# EAGLE board ESP32_Thing_Plus-Panel (EAGLE 9.6.2), part 1 of 4
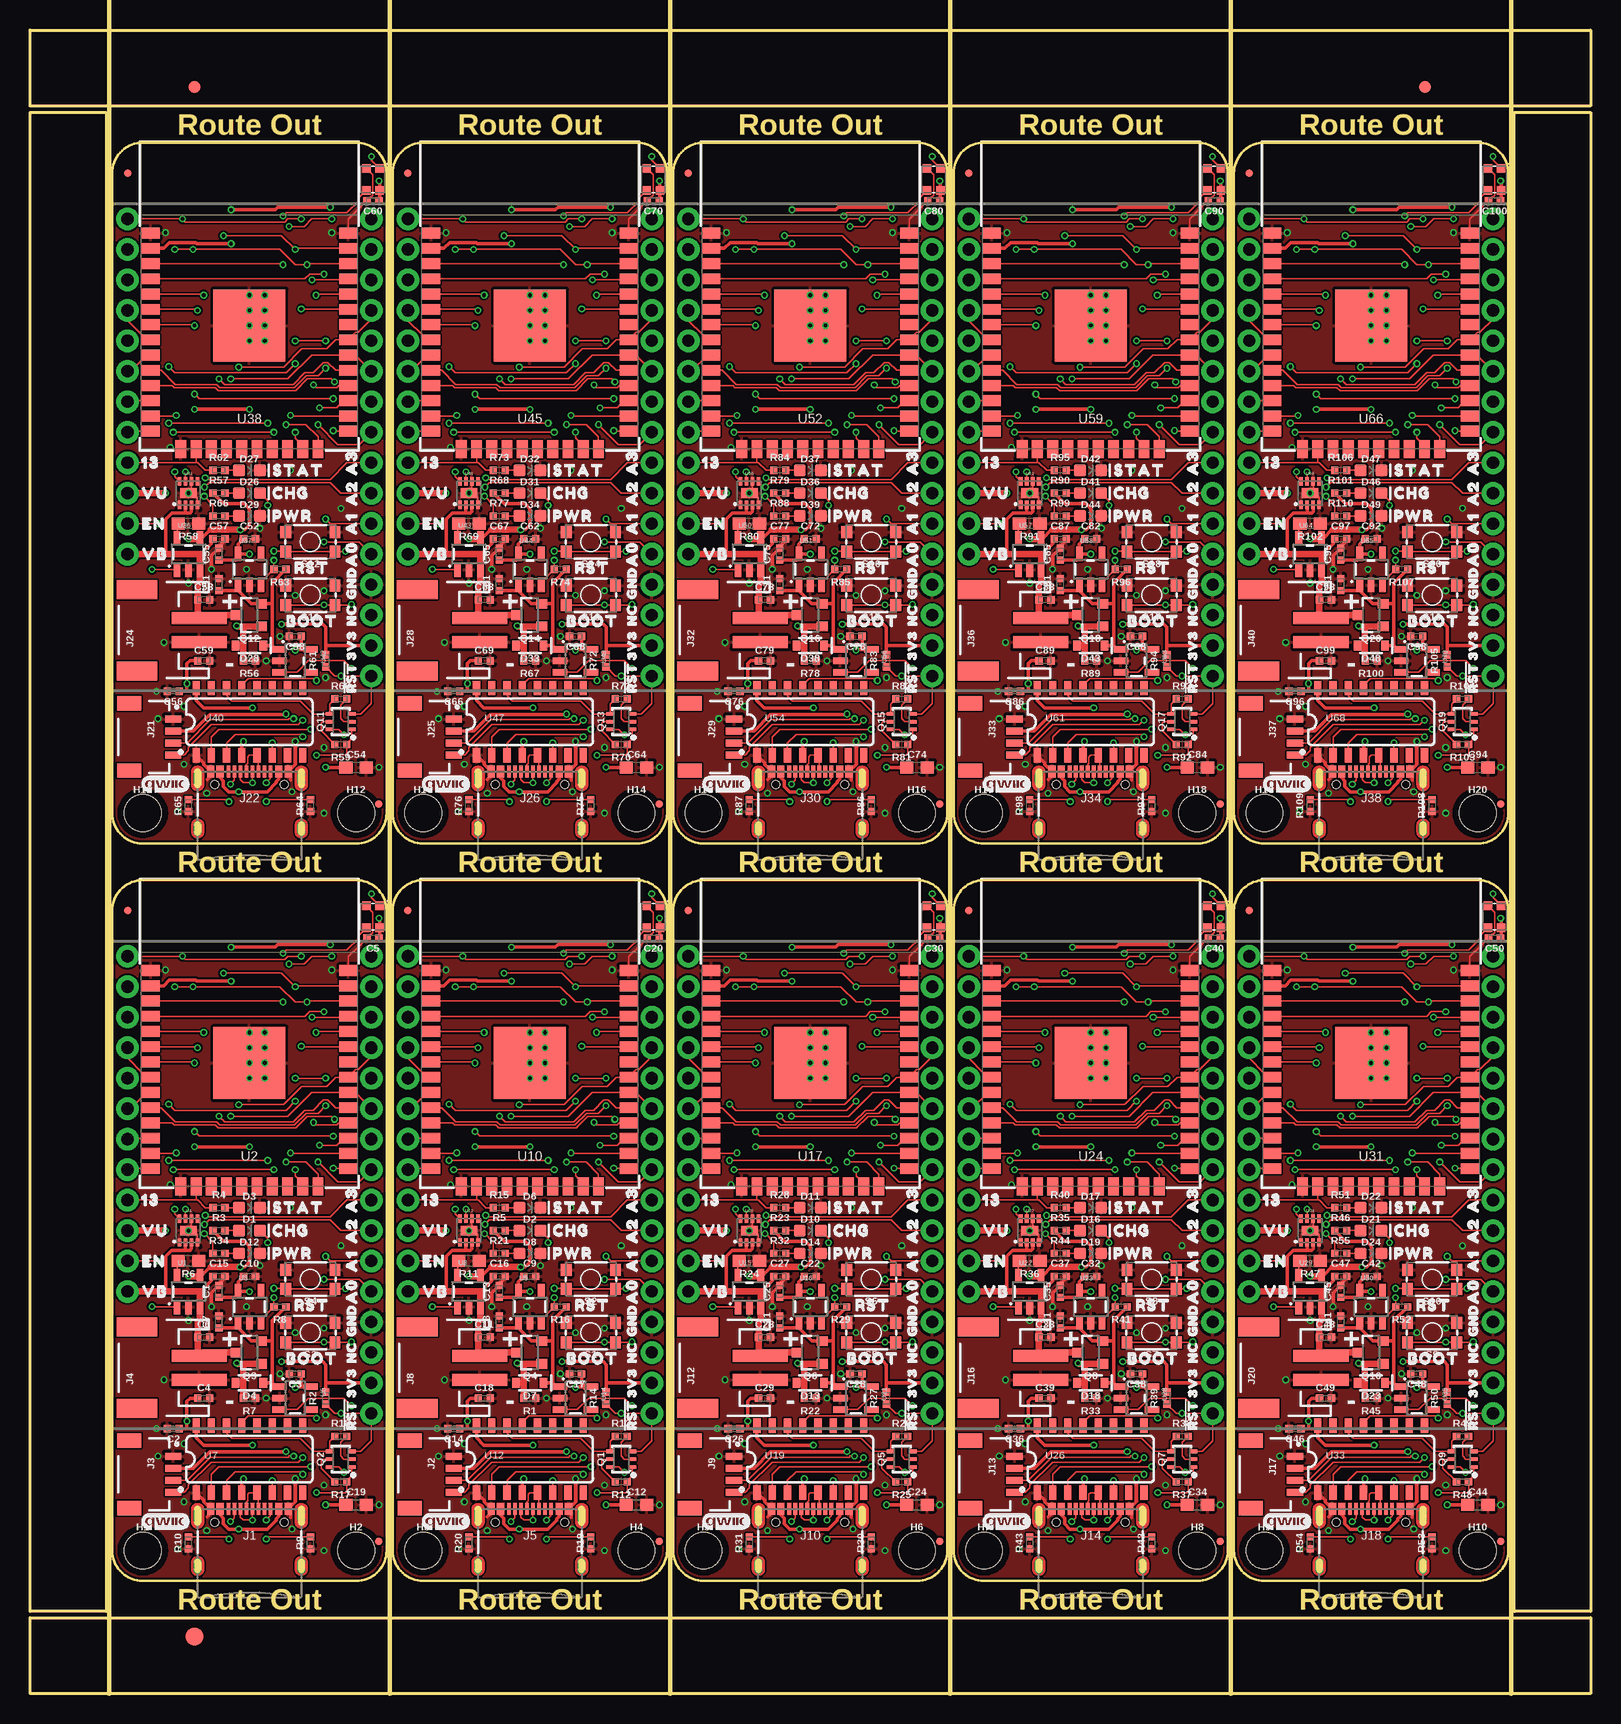
[diagram p0: board, top side]
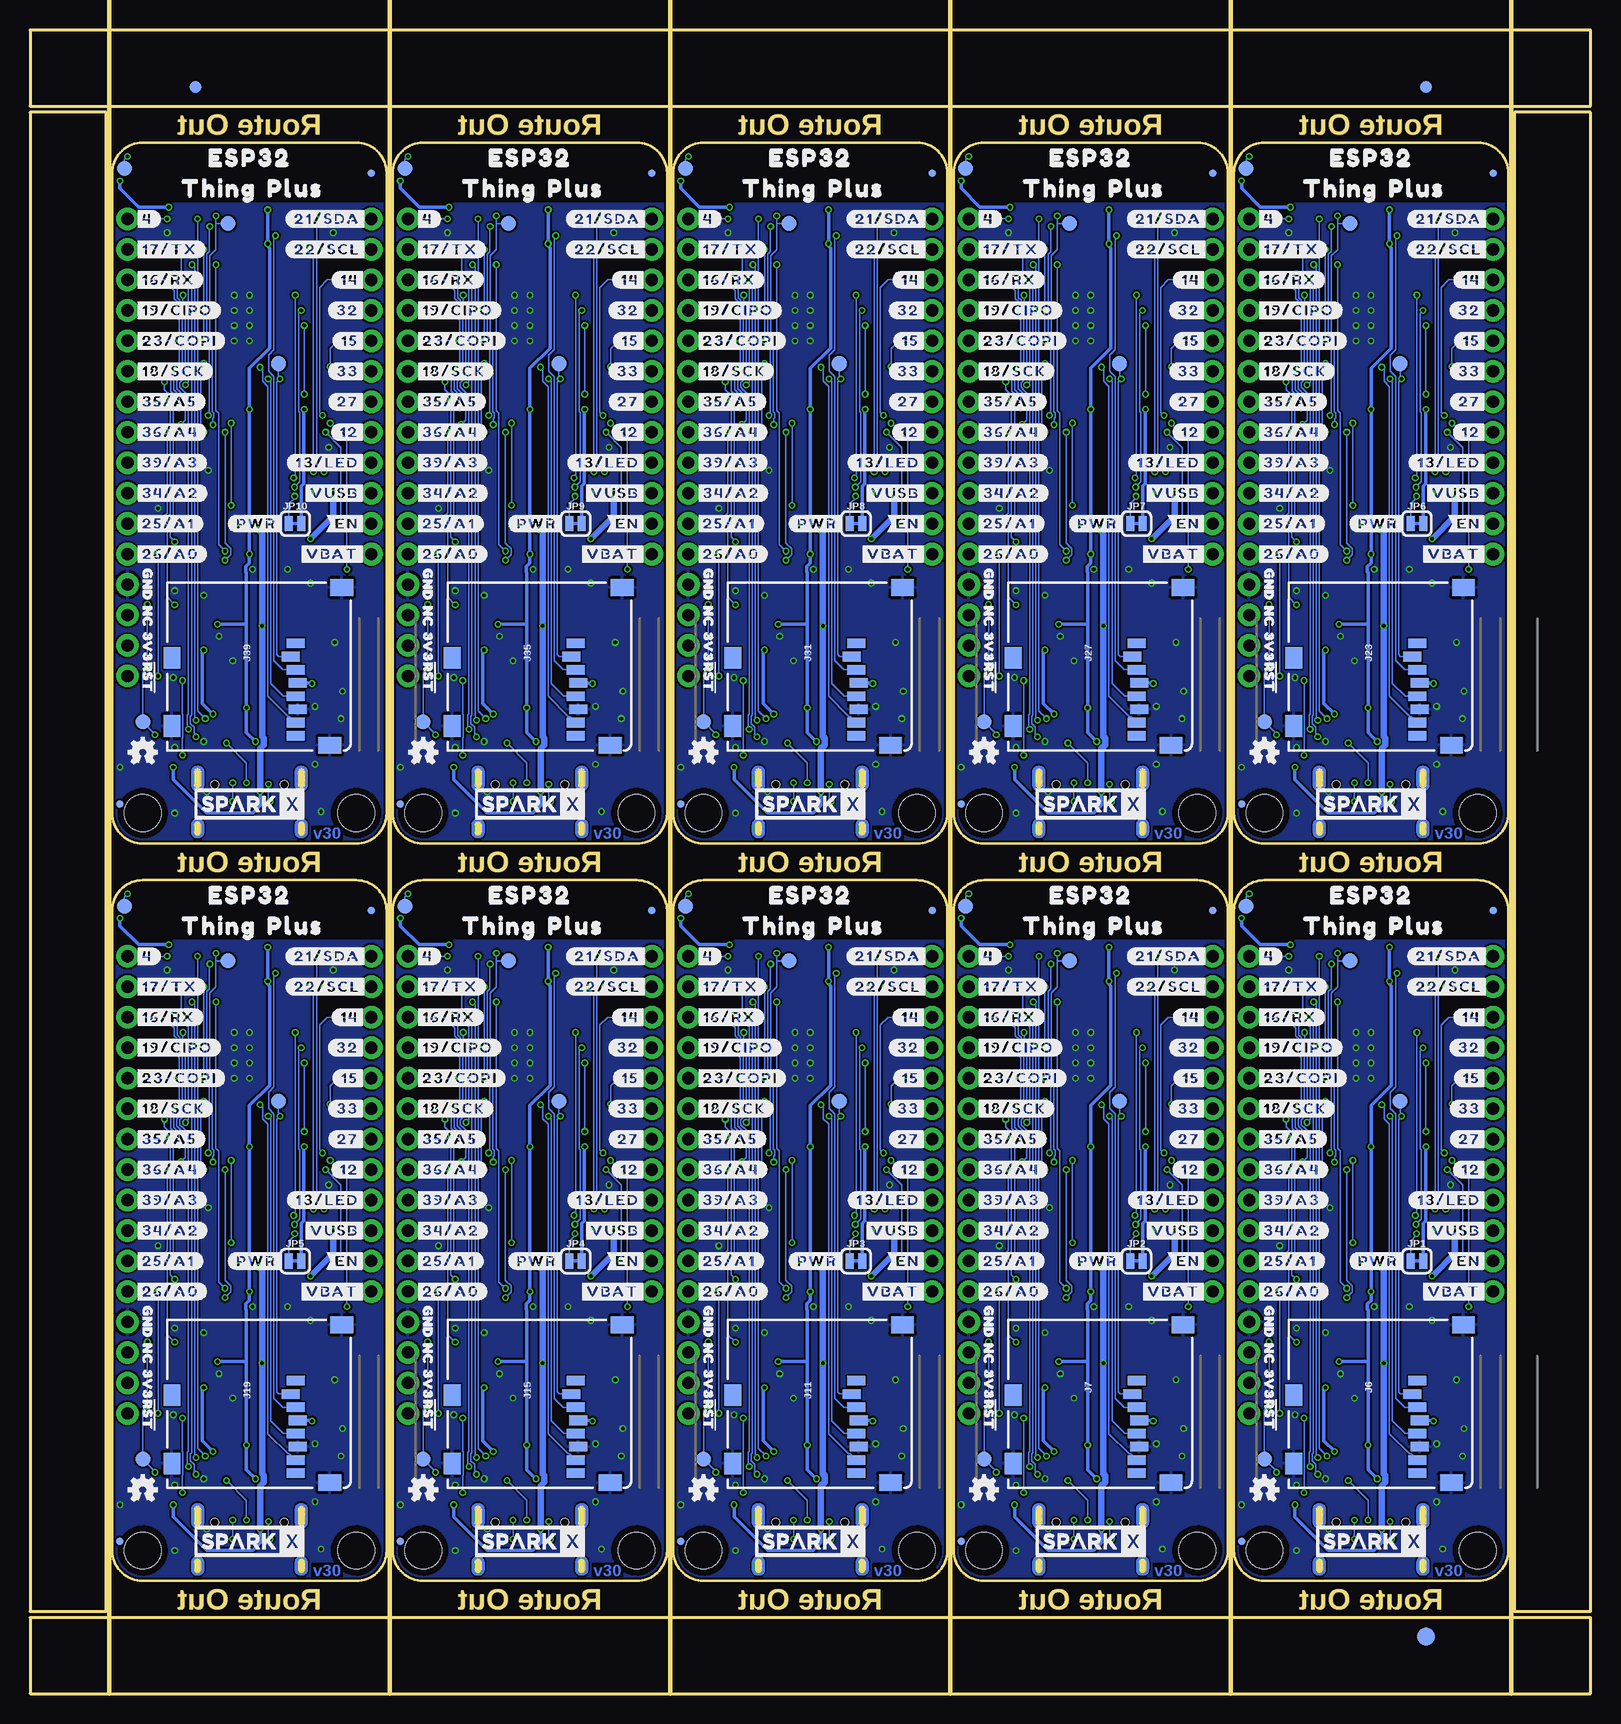
[diagram p1: board, bottom side, seen from below]

Size 130.05 x 138.68 mm. Coordinates in mm from the lower left corner, seen from the top.
Outline: 29.72,11.94 29.72,65.28 arc90 27.18,67.82 9.4,67.82 arc90 6.86,65.28 6.86,11.94 arc90 9.4,9.4 27.18,9.4 arc90 29.72,11.94
Outline: 53.09,11.94 53.09,65.28 arc90 50.55,67.82 32.77,67.82 arc90 30.23,65.28 30.23,11.94 arc90 32.77,9.4 50.55,9.4 arc90 53.09,11.94
Outline: 76.45,11.94 76.45,65.28 arc90 73.91,67.82 56.13,67.82 arc90 53.59,65.28 53.59,11.94 arc90 56.13,9.4 73.91,9.4 arc90 76.45,11.94
Outline: 99.82,11.94 99.82,65.28 arc90 97.28,67.82 79.5,67.82 arc90 76.96,65.28 76.96,11.94 arc90 79.5,9.4 97.28,9.4 arc90 99.82,11.94
Outline: 123.19,11.94 123.19,65.28 arc90 120.65,67.82 102.87,67.82 arc90 100.33,65.28 100.33,11.94 arc90 102.87,9.4 120.65,9.4 arc90 123.19,11.94
Outline: 29.72,73.41 29.72,126.75 arc90 27.18,129.29 9.4,129.29 arc90 6.86,126.75 6.86,73.41 arc90 9.4,70.87 27.18,70.87 arc90 29.72,73.41
Outline: 53.09,73.41 53.09,126.75 arc90 50.55,129.29 32.77,129.29 arc90 30.23,126.75 30.23,73.41 arc90 32.77,70.87 50.55,70.87 arc90 53.09,73.41
Outline: 76.45,73.41 76.45,126.75 arc90 73.91,129.29 56.13,129.29 arc90 53.59,126.75 53.59,73.41 arc90 56.13,70.87 73.91,70.87 arc90 76.45,73.41
Outline: 99.82,73.41 99.82,126.75 arc90 97.28,129.29 79.5,129.29 arc90 76.96,126.75 76.96,73.41 arc90 79.5,70.87 97.28,70.87 arc90 99.82,73.41
Outline: 123.19,73.41 123.19,126.75 arc90 120.65,129.29 102.87,129.29 arc90 100.33,126.75 100.33,73.41 arc90 102.87,70.87 120.65,70.87 arc90 123.19,73.41
Outline: 0,6.35 130.05,6.35 130.05,0 0,0 0,6.35
Outline: 123.7,131.83 130.05,131.83 130.05,6.86 123.7,6.86 123.7,131.83
Outline: 0,138.68 130.05,138.68 130.05,132.33 0,132.33 0,138.68
Outline: 0,131.83 6.35,131.83 6.35,6.86 0,6.86 0,131.83
Copper layers (1*16): Top 0.035mm / dielectric 1.5mm / Bottom 0.035mm
Design rules "ESP32_Thing_Plus": minimum track width 5mil, minimum drill 0.3mm, track to track 5mil, track to pad 5mil, pad to pad 5mil, via to via 5mil, smd to smd 5mil, copper to edge 7mil, drill to drill 7mil, minimum pad ring 5mil, minimum via ring 5mil, stop-mask expansion 4mil, vias tented up to drill 25mil, thermal gap 10mil
Net classes: 0 default: width 0.127 mm, drill 0.305 mm; 1 power: width 0.305 mm, drill 0.305 mm
Milling: 6 lines

## Footprints (pad centres in the part's own frame; a part is rotated, then mirrored left to right if it is on the bottom)
0402-TIGHT = smd 0.6 x 0.6: 1 -0.5,0; 2 0.5,0
0603 = smd 1.1 x 1: 1 -0.85,0; 2 0.85,0
LED-0603 = smd 1 x 1: A -0.877,0; C 0.877,0
SOD-323 = smd 0.63 x 0.83: A 1.15,0; C -1.15,0
WS2812-2020 = smd 0.7 x 0.7: DI -0.915,0.55; DO 0.915,-0.55; GND 0.915,0.55; VCC -0.915,-0.55
FIDUCIAL-1X2 = smd 1 x 1: 1 0,0
FIDUCIAL-1.5X3 = smd 1.5 x 1.5: 1 0,0
FIDUCIAL-MICRO = smd 0.635 x 0.635: 1 0,0
STAND-OFF-TIGHT = hole 3.048: 0,0
USB-C-16P-2LAYER-PADS = smd 0.3 x 1: A5 -1.25,-0.34; A6 -0.25,-0.34; A7 0.25,-0.34; A8 1.25,-0.34; B5 1.75,-0.34; B6 0.75,-0.34; B7 -0.75,-0.34; B8 -1.75,-0.34 | smd 0.6 x 1: GND -3.225,-0.34; GND2 3.225,-0.34; VBUS1 -2.45,-0.34; VBUS2 2.45,-0.34 | drill 0.4 pad 0.6 long: SHLD1 -4.318,-0.915; SHLD2 4.318,-0.915; SHLD3 -4.318,-5.095; SHLD4 4.318,-5.095 | hole 0.65: -2.89,-1.445; 2.89,-1.445
JST04_1MM_RA = smd 0.6 x 1.35: 1 -1.5,0; 2 -0.5,0; 3 0.5,0; 4 1.5,0 | smd 1.2 x 2: NC1 2.8,-3.675; NC2 -2.8,-3.675
JST-2-SMD = smd 1 x 4.6: 1 -1,-3.7; 2 1,-3.7 | smd 1.6 x 3.4: NC1 -3.4,1.5; NC2 3.4,1.5
MICRO-SD-SOCKET = smd 1.8 x 1.4: CD1 -2.05,0.4; CD2 -7.75,0.4 | smd 0.8 x 1.5: CS/DAT3 -7.84,10.3; DAT1 -1.24,10.7; DAT2 -8.94,10.7; DI/CMD -6.74,10.7; DO/DAT0 -2.34,10.7; GND -3.44,10.9; SCLK -4.54,10.7; VCC -5.64,10.9 | smd 1.4 x 1.9: GND1 -13.6,14.55; GND3 -0.45,13.55
SMT-JUMPER_2_NC_TRACE_SILK = smd 0.66 x 1.27: 1 -0.521,0; 2 0.521,0
SC70-6 = smd 0.3 x 0.66: 1 -0.65,-0.92; 2 0,-0.92; 3 0.65,-0.92; 4 0.65,0.92; 5 0,0.92; 6 -0.65,0.92
SOT23-3 = smd 0.8 x 0.9: 1 -0.95,-1; 2 0.95,-1; 3 0,1.1
TACTILE_SWITCH_SMD_4.6X2.8MM = smd 0.9 x 1: 1 -2.05,-0.8; 2 2.05,-0.8; 3 2.05,0.8; 4 -2.05,0.8
PAD.03X.05 = smd 1.27 x 1.27: P$1 0,0
SOT23-5 = smd 0.55 x 1.2: 1 -0.95,-1.3; 2 0,-1.3; 3 0.95,-1.3; 4 0.95,1.3; 5 -0.95,1.3
ESP-WROOM-32-NARROW = smd 0.9 x 1.5: 1 6.43,8.238; 2 5.16,8.238; 3 3.89,8.238; 4 2.62,8.238; 5 1.35,8.238; 6 0.08,8.238; 7 -1.19,8.238; 8 -2.46,8.238; 9 -3.73,8.238; 10 -5,8.238; 11 -6.27,8.238; 12 -7.54,8.238; 13 -8.81,8.238; 14 -10.08,8.238; 25 -10.08,-8.238; 26 -8.81,-8.238; 27 -7.54,-8.238; 28 -6.27,-8.238; 29 -5,-8.238; 30 -3.73,-8.238; 31 -2.46,-8.238; 32 -1.19,-8.238; 33 0.08,-8.238; 34 1.35,-8.238; 35 2.62,-8.238; 36 3.89,-8.238; 37 5.16,-8.238; 38 6.43,-8.238 | smd 1.5 x 0.9: 15 -11.57,5.715; 16 -11.57,4.445; 17 -11.57,3.175; 18 -11.57,1.905; 19 -11.57,0.635; 20 -11.57,-0.635; 21 -11.57,-1.905; 22 -11.57,-3.175; 23 -11.57,-4.445; 24 -11.57,-5.715 | smd 6 x 6: GND -1.27,0
DFN-8 = smd 0.3 x 0.7: 1 -0.75,-0.99; 2 -0.25,-0.99; 3 0.25,-0.99; 4 0.75,-0.99; 5 0.75,0.99; 6 0.25,0.99; 7 -0.25,0.99; 8 -0.75,0.99 | smd 1.38 x 0.8: 9 0,0
THINGPLUS_FOOTPRINT = drill 1.016 pad 1.88: 3V3 10.16,-19.05; 7 -10.16,11.43; 8 -10.16,8.89; 9 -10.16,6.35; 10 -10.16,3.81; 11 -10.16,1.27; 12 -10.16,-1.27; 13 -10.16,-3.81; A0 10.16,-11.43; A1 10.16,-8.89; A2 10.16,-6.35; A3 10.16,-3.81; A4 10.16,-1.27; A5 10.16,1.27; AREF 10.16,-16.51; CIPO 10.16,8.89; COPI 10.16,6.35; EN -10.16,-8.89; FREEBIE 10.16,16.51; GND 10.16,-13.97; RST 10.16,-21.59; RX 10.16,11.43; SCK 10.16,3.81; SCL -10.16,13.97; SDA -10.16,16.51; TX 10.16,13.97; V_BATT -10.16,-11.43; V_USB -10.16,-6.35
SO016 = smd 0.6 x 1.2: 1 -4.445,-2.8; 2 -3.175,-2.8; 3 -1.905,-2.8; 4 -0.635,-2.8; 5 0.635,-2.8; 6 1.905,-2.8; 7 3.175,-2.8; 8 4.445,-2.8; 9 4.445,2.8; 10 3.175,2.8; 11 1.905,2.8; 12 0.635,2.8; 13 -0.635,2.8; 14 -1.905,2.8; 15 -3.175,2.8; 16 -4.445,2.8

## Placement (x,y rotation side)
C1  10uF  [0402-TIGHT]  15.75,33.53 90 top
C2  0.1uF  [0402-TIGHT]  11.94,22.1 180 top
C3  1.0uF  [0402-TIGHT]  22.1,26.67 180 top
C4  0.1uF  [0402-TIGHT]  14.48,24.64 0 top
C5  0.1uF  [0402-TIGHT]  28.57,62.99 180 top
C6  4.7uF  [0402-TIGHT]  14.48,29.72 0 top
C7  1.0uF  [0402-TIGHT]  15.75,30.99 90 top
C8  1.0uF  [0402-TIGHT]  39.12,30.99 90 top
C9  1.0uF  [0402-TIGHT]  41.66,34.8 0 top
C10  1.0uF  [0402-TIGHT]  18.29,34.8 0 top
C11  4.7uF  [0402-TIGHT]  37.85,29.72 0 top
C12  4.7uF  [0603]  50.55,15.75 0 top
C13  10uF  [0402-TIGHT]  39.12,33.53 90 top
C14  0.1uF  [0402-TIGHT]  35.31,22.1 180 top
C15  0.1uF  [0402-TIGHT]  15.75,34.8 0 top
C16  0.1uF  [0402-TIGHT]  39.12,34.8 0 top
C17  1.0uF  [0402-TIGHT]  45.47,26.67 180 top
C18  0.1uF  [0402-TIGHT]  37.85,24.64 0 top
C19  4.7uF  [0603]  27.18,15.75 0 top
C20  0.1uF  [0402-TIGHT]  51.94,62.99 180 top
C21  1.0uF  [0402-TIGHT]  62.48,30.99 90 top
C22  1.0uF  [0402-TIGHT]  65.02,34.8 0 top
C23  4.7uF  [0402-TIGHT]  61.21,29.72 0 top
C24  4.7uF  [0603]  73.91,15.75 0 top
C25  10uF  [0402-TIGHT]  62.48,33.53 90 top
C26  0.1uF  [0402-TIGHT]  58.67,22.1 180 top
C27  0.1uF  [0402-TIGHT]  62.48,34.8 0 top
C28  1.0uF  [0402-TIGHT]  68.83,26.67 180 top
C29  0.1uF  [0402-TIGHT]  61.21,24.64 0 top
C30  0.1uF  [0402-TIGHT]  75.31,62.99 180 top
C31  1.0uF  [0402-TIGHT]  85.85,30.99 90 top
C32  1.0uF  [0402-TIGHT]  88.39,34.8 0 top
C33  4.7uF  [0402-TIGHT]  84.58,29.72 0 top
C34  4.7uF  [0603]  97.28,15.75 0 top
C35  10uF  [0402-TIGHT]  85.85,33.53 90 top
C36  0.1uF  [0402-TIGHT]  82.04,22.1 180 top
C37  0.1uF  [0402-TIGHT]  85.85,34.8 0 top
C38  1.0uF  [0402-TIGHT]  92.2,26.67 180 top
C39  0.1uF  [0402-TIGHT]  84.58,24.64 0 top
C40  0.1uF  [0402-TIGHT]  98.68,62.99 180 top
C41  1.0uF  [0402-TIGHT]  109.22,30.99 90 top
C42  1.0uF  [0402-TIGHT]  111.76,34.8 0 top
C43  4.7uF  [0402-TIGHT]  107.95,29.72 0 top
C44  4.7uF  [0603]  120.65,15.75 0 top
C45  10uF  [0402-TIGHT]  109.22,33.53 90 top
C46  0.1uF  [0402-TIGHT]  105.41,22.1 180 top
C47  0.1uF  [0402-TIGHT]  109.22,34.8 0 top
C48  1.0uF  [0402-TIGHT]  115.57,26.67 180 top
C49  0.1uF  [0402-TIGHT]  107.95,24.64 0 top
C50  0.1uF  [0402-TIGHT]  122.05,62.99 180 top
C51  1.0uF  [0402-TIGHT]  15.75,92.46 90 top
C52  1.0uF  [0402-TIGHT]  18.29,96.27 0 top
C53  4.7uF  [0402-TIGHT]  14.48,91.19 0 top
C54  4.7uF  [0603]  27.18,77.22 0 top
C55  10uF  [0402-TIGHT]  15.75,95 90 top
C56  0.1uF  [0402-TIGHT]  11.94,83.57 180 top
C57  0.1uF  [0402-TIGHT]  15.75,96.27 0 top
C58  1.0uF  [0402-TIGHT]  22.1,88.14 180 top
C59  0.1uF  [0402-TIGHT]  14.48,86.11 0 top
C60  0.1uF  [0402-TIGHT]  28.57,124.46 180 top
C61  1.0uF  [0402-TIGHT]  39.12,92.46 90 top
C62  1.0uF  [0402-TIGHT]  41.66,96.27 0 top
C63  4.7uF  [0402-TIGHT]  37.85,91.19 0 top
C64  4.7uF  [0603]  50.55,77.22 0 top
C65  10uF  [0402-TIGHT]  39.12,95 90 top
C66  0.1uF  [0402-TIGHT]  35.31,83.57 180 top
C67  0.1uF  [0402-TIGHT]  39.12,96.27 0 top
C68  1.0uF  [0402-TIGHT]  45.47,88.14 180 top
C69  0.1uF  [0402-TIGHT]  37.85,86.11 0 top
C70  0.1uF  [0402-TIGHT]  51.94,124.46 180 top
C71  1.0uF  [0402-TIGHT]  62.48,92.46 90 top
C72  1.0uF  [0402-TIGHT]  65.02,96.27 0 top
C73  4.7uF  [0402-TIGHT]  61.21,91.19 0 top
C74  4.7uF  [0603]  73.91,77.22 0 top
C75  10uF  [0402-TIGHT]  62.48,95 90 top
C76  0.1uF  [0402-TIGHT]  58.67,83.57 180 top
C77  0.1uF  [0402-TIGHT]  62.48,96.27 0 top
C78  1.0uF  [0402-TIGHT]  68.83,88.14 180 top
C79  0.1uF  [0402-TIGHT]  61.21,86.11 0 top
C80  0.1uF  [0402-TIGHT]  75.31,124.46 180 top
C81  1.0uF  [0402-TIGHT]  85.85,92.46 90 top
C82  1.0uF  [0402-TIGHT]  88.39,96.27 0 top
C83  4.7uF  [0402-TIGHT]  84.58,91.19 0 top
C84  4.7uF  [0603]  97.28,77.22 0 top
C85  10uF  [0402-TIGHT]  85.85,95 90 top
C86  0.1uF  [0402-TIGHT]  82.04,83.57 180 top
C87  0.1uF  [0402-TIGHT]  85.85,96.27 0 top
C88  1.0uF  [0402-TIGHT]  92.2,88.14 180 top
C89  0.1uF  [0402-TIGHT]  84.58,86.11 0 top
C90  0.1uF  [0402-TIGHT]  98.68,124.46 180 top
C91  1.0uF  [0402-TIGHT]  109.22,92.46 90 top
C92  1.0uF  [0402-TIGHT]  111.76,96.27 0 top
C93  4.7uF  [0402-TIGHT]  107.95,91.19 0 top
C94  4.7uF  [0603]  120.65,77.22 0 top
C95  10uF  [0402-TIGHT]  109.22,95 90 top
C96  0.1uF  [0402-TIGHT]  105.41,83.57 180 top
C97  0.1uF  [0402-TIGHT]  109.22,96.27 0 top
C98  1.0uF  [0402-TIGHT]  115.57,88.14 180 top
C99  0.1uF  [0402-TIGHT]  107.95,86.11 0 top
C100  0.1uF  [0402-TIGHT]  122.05,124.46 180 top
D1  Yellow  [LED-0603]  18.29,38.61 0 top
D2  Yellow  [LED-0603]  41.66,38.61 0 top
D3  BLUE  [LED-0603]  18.29,40.51 0 top
D4  3A/10V/280mV  [SOD-323]  18.29,25.91 180 top
D5  WS2812  [WS2812-2020]  28.57,64.77 90 top
D6  BLUE  [LED-0603]  41.66,40.51 0 top
D7  3A/10V/280mV  [SOD-323]  41.66,25.91 180 top
D8  RED  [LED-0603]  41.66,36.7 0 top
D9  WS2812  [WS2812-2020]  51.94,64.77 90 top
D10  Yellow  [LED-0603]  65.02,38.61 0 top
D11  BLUE  [LED-0603]  65.02,40.51 0 top
D12  RED  [LED-0603]  18.29,36.7 0 top
D13  3A/10V/280mV  [SOD-323]  65.02,25.91 180 top
D14  RED  [LED-0603]  65.02,36.7 0 top
D15  WS2812  [WS2812-2020]  75.31,64.77 90 top
D16  Yellow  [LED-0603]  88.39,38.61 0 top
D17  BLUE  [LED-0603]  88.39,40.51 0 top
D18  3A/10V/280mV  [SOD-323]  88.39,25.91 180 top
D19  RED  [LED-0603]  88.39,36.7 0 top
D20  WS2812  [WS2812-2020]  98.68,64.77 90 top
D21  Yellow  [LED-0603]  111.76,38.61 0 top
D22  BLUE  [LED-0603]  111.76,40.51 0 top
D23  3A/10V/280mV  [SOD-323]  111.76,25.91 180 top
D24  RED  [LED-0603]  111.76,36.7 0 top
D25  WS2812  [WS2812-2020]  122.05,64.77 90 top
D26  Yellow  [LED-0603]  18.29,100.08 0 top
D27  BLUE  [LED-0603]  18.29,101.98 0 top
D28  3A/10V/280mV  [SOD-323]  18.29,87.38 180 top
D29  RED  [LED-0603]  18.29,98.17 0 top
D30  WS2812  [WS2812-2020]  28.57,126.24 90 top
D31  Yellow  [LED-0603]  41.66,100.08 0 top
D32  BLUE  [LED-0603]  41.66,101.98 0 top
D33  3A/10V/280mV  [SOD-323]  41.66,87.38 180 top
D34  RED  [LED-0603]  41.66,98.17 0 top
D35  WS2812  [WS2812-2020]  51.94,126.24 90 top
D36  Yellow  [LED-0603]  65.02,100.08 0 top
D37  BLUE  [LED-0603]  65.02,101.98 0 top
D38  3A/10V/280mV  [SOD-323]  65.02,87.38 180 top
D39  RED  [LED-0603]  65.02,98.17 0 top
D40  WS2812  [WS2812-2020]  75.31,126.24 90 top
D41  Yellow  [LED-0603]  88.39,100.08 0 top
D42  BLUE  [LED-0603]  88.39,101.98 0 top
D43  3A/10V/280mV  [SOD-323]  88.39,87.38 180 top
D44  RED  [LED-0603]  88.39,98.17 0 top
D45  WS2812  [WS2812-2020]  98.68,126.24 90 top
D46  Yellow  [LED-0603]  111.76,100.08 0 top
D47  BLUE  [LED-0603]  111.76,101.98 0 top
D48  3A/10V/280mV  [SOD-323]  111.76,87.38 180 top
D49  RED  [LED-0603]  111.76,98.17 0 top
D50  WS2812  [WS2812-2020]  122.05,126.24 90 top
E$1  [FIDUCIAL-1X2]  13.72,133.92 0 top
E$2  [FIDUCIAL-1X2]  13.72,133.92 0 bottom
E$3  [FIDUCIAL-1X2]  116.27,133.92 0 top
E$4  [FIDUCIAL-1X2]  116.27,133.92 0 bottom
E$5  [FIDUCIAL-1.5X3]  13.72,4.76 0 top
E$6  [FIDUCIAL-1.5X3]  13.72,4.76 0 bottom
FD1  FIDUCIALUFIDUCIAL  [FIDUCIAL-MICRO]  8.13,65.28 0 top
FD2  FIDUCIALUFIDUCIAL  [FIDUCIAL-MICRO]  8.13,65.28 0 bottom
FD3  FIDUCIALUFIDUCIAL  [FIDUCIAL-MICRO]  29.08,12.7 0 top
FD4  FIDUCIALUFIDUCIAL  [FIDUCIAL-MICRO]  29.08,12.7 0 bottom
FD5  FIDUCIALUFIDUCIAL  [FIDUCIAL-MICRO]  31.5,65.28 0 top
FD6  FIDUCIALUFIDUCIAL  [FIDUCIAL-MICRO]  31.5,65.28 0 bottom
FD7  FIDUCIALUFIDUCIAL  [FIDUCIAL-MICRO]  52.45,12.7 0 top
FD8  FIDUCIALUFIDUCIAL  [FIDUCIAL-MICRO]  52.45,12.7 0 bottom
FD9  FIDUCIALUFIDUCIAL  [FIDUCIAL-MICRO]  54.86,65.28 0 top
FD10  FIDUCIALUFIDUCIAL  [FIDUCIAL-MICRO]  54.86,65.28 0 bottom
FD11  FIDUCIALUFIDUCIAL  [FIDUCIAL-MICRO]  75.82,12.7 0 top
FD12  FIDUCIALUFIDUCIAL  [FIDUCIAL-MICRO]  75.82,12.7 0 bottom
FD13  FIDUCIALUFIDUCIAL  [FIDUCIAL-MICRO]  78.23,65.28 0 top
FD14  FIDUCIALUFIDUCIAL  [FIDUCIAL-MICRO]  78.23,65.28 0 bottom
FD15  FIDUCIALUFIDUCIAL  [FIDUCIAL-MICRO]  99.19,12.7 0 top
FD16  FIDUCIALUFIDUCIAL  [FIDUCIAL-MICRO]  99.19,12.7 0 bottom
FD17  FIDUCIALUFIDUCIAL  [FIDUCIAL-MICRO]  101.6,65.28 0 top
FD18  FIDUCIALUFIDUCIAL  [FIDUCIAL-MICRO]  101.6,65.28 0 bottom
FD19  FIDUCIALUFIDUCIAL  [FIDUCIAL-MICRO]  122.56,12.7 0 top
FD20  FIDUCIALUFIDUCIAL  [FIDUCIAL-MICRO]  122.56,12.7 0 bottom
FD21  FIDUCIALUFIDUCIAL  [FIDUCIAL-MICRO]  8.13,126.75 0 top
FD22  FIDUCIALUFIDUCIAL  [FIDUCIAL-MICRO]  8.13,126.75 0 bottom
FD23  FIDUCIALUFIDUCIAL  [FIDUCIAL-MICRO]  29.08,74.17 0 top
FD24  FIDUCIALUFIDUCIAL  [FIDUCIAL-MICRO]  29.08,74.17 0 bottom
FD25  FIDUCIALUFIDUCIAL  [FIDUCIAL-MICRO]  31.5,126.75 0 top
FD26  FIDUCIALUFIDUCIAL  [FIDUCIAL-MICRO]  31.5,126.75 0 bottom
FD27  FIDUCIALUFIDUCIAL  [FIDUCIAL-MICRO]  52.45,74.17 0 top
FD28  FIDUCIALUFIDUCIAL  [FIDUCIAL-MICRO]  52.45,74.17 0 bottom
FD29  FIDUCIALUFIDUCIAL  [FIDUCIAL-MICRO]  54.86,126.75 0 top
FD30  FIDUCIALUFIDUCIAL  [FIDUCIAL-MICRO]  54.86,126.75 0 bottom
FD31  FIDUCIALUFIDUCIAL  [FIDUCIAL-MICRO]  75.82,74.17 0 top
FD32  FIDUCIALUFIDUCIAL  [FIDUCIAL-MICRO]  75.82,74.17 0 bottom
FD33  FIDUCIALUFIDUCIAL  [FIDUCIAL-MICRO]  78.23,126.75 0 top
FD34  FIDUCIALUFIDUCIAL  [FIDUCIAL-MICRO]  78.23,126.75 0 bottom
FD35  FIDUCIALUFIDUCIAL  [FIDUCIAL-MICRO]  99.19,74.17 0 top
FD36  FIDUCIALUFIDUCIAL  [FIDUCIAL-MICRO]  99.19,74.17 0 bottom
FD37  FIDUCIALUFIDUCIAL  [FIDUCIAL-MICRO]  101.6,126.75 0 top
FD38  FIDUCIALUFIDUCIAL  [FIDUCIAL-MICRO]  101.6,126.75 0 bottom
FD39  FIDUCIALUFIDUCIAL  [FIDUCIAL-MICRO]  122.56,74.17 0 top
FD40  FIDUCIALUFIDUCIAL  [FIDUCIAL-MICRO]  122.56,74.17 0 bottom
H1  STAND-OFFTIGHT  [STAND-OFF-TIGHT]  9.4,11.94 0 top
H2  STAND-OFFTIGHT  [STAND-OFF-TIGHT]  27.18,11.94 0 top
H3  STAND-OFFTIGHT  [STAND-OFF-TIGHT]  32.77,11.94 0 top
H4  STAND-OFFTIGHT  [STAND-OFF-TIGHT]  50.55,11.94 0 top
H5  STAND-OFFTIGHT  [STAND-OFF-TIGHT]  56.13,11.94 0 top
H6  STAND-OFFTIGHT  [STAND-OFF-TIGHT]  73.91,11.94 0 top
H7  STAND-OFFTIGHT  [STAND-OFF-TIGHT]  79.5,11.94 0 top
H8  STAND-OFFTIGHT  [STAND-OFF-TIGHT]  97.28,11.94 0 top
H9  STAND-OFFTIGHT  [STAND-OFF-TIGHT]  102.87,11.94 0 top
H10  STAND-OFFTIGHT  [STAND-OFF-TIGHT]  120.65,11.94 0 top
H11  STAND-OFFTIGHT  [STAND-OFF-TIGHT]  9.4,73.41 0 top
H12  STAND-OFFTIGHT  [STAND-OFF-TIGHT]  27.18,73.41 0 top
H13  STAND-OFFTIGHT  [STAND-OFF-TIGHT]  32.77,73.41 0 top
H14  STAND-OFFTIGHT  [STAND-OFF-TIGHT]  50.55,73.41 0 top
H15  STAND-OFFTIGHT  [STAND-OFF-TIGHT]  56.13,73.41 0 top
H16  STAND-OFFTIGHT  [STAND-OFF-TIGHT]  73.91,73.41 0 top
H17  STAND-OFFTIGHT  [STAND-OFF-TIGHT]  79.5,73.41 0 top
H18  STAND-OFFTIGHT  [STAND-OFF-TIGHT]  97.28,73.41 0 top
H19  STAND-OFFTIGHT  [STAND-OFF-TIGHT]  102.87,73.41 0 top
H20  STAND-OFFTIGHT  [STAND-OFF-TIGHT]  120.65,73.41 0 top
J1  [USB-C-16P-2LAYER-PADS]  18.29,15.75 0 top
J2  QWIIC_RIGHT_ANGLE  [JST04_1MM_RA]  35.31,18.29 270 top
J3  QWIIC_RIGHT_ANGLE  [JST04_1MM_RA]  11.94,18.29 270 top
J4  [JST-2-SMD]  10.41,27.18 90 top
J5  [USB-C-16P-2LAYER-PADS]  41.66,15.75 0 top
J6  microSD  [MICRO-SD-SOCKET]  25.15,17.14 270 bottom
J7  microSD  [MICRO-SD-SOCKET]  48.51,17.14 270 bottom
J8  [JST-2-SMD]  33.78,27.18 90 top
J9  QWIIC_RIGHT_ANGLE  [JST04_1MM_RA]  58.67,18.29 270 top
J10  [USB-C-16P-2LAYER-PADS]  65.02,15.75 0 top
J11  microSD  [MICRO-SD-SOCKET]  71.88,17.14 270 bottom
J12  [JST-2-SMD]  57.15,27.18 90 top
J13  QWIIC_RIGHT_ANGLE  [JST04_1MM_RA]  82.04,18.29 270 top
J14  [USB-C-16P-2LAYER-PADS]  88.39,15.75 0 top
J15  microSD  [MICRO-SD-SOCKET]  95.25,17.14 270 bottom
J16  [JST-2-SMD]  80.52,27.18 90 top
J17  QWIIC_RIGHT_ANGLE  [JST04_1MM_RA]  105.41,18.29 270 top
J18  [USB-C-16P-2LAYER-PADS]  111.76,15.75 0 top
J19  microSD  [MICRO-SD-SOCKET]  118.62,17.14 270 bottom
J20  [JST-2-SMD]  103.89,27.18 90 top
J21  QWIIC_RIGHT_ANGLE  [JST04_1MM_RA]  11.94,79.76 270 top
J22  [USB-C-16P-2LAYER-PADS]  18.29,77.22 0 top
J23  microSD  [MICRO-SD-SOCKET]  25.15,78.61 270 bottom
J24  [JST-2-SMD]  10.41,88.65 90 top
J25  QWIIC_RIGHT_ANGLE  [JST04_1MM_RA]  35.31,79.76 270 top
J26  [USB-C-16P-2LAYER-PADS]  41.66,77.22 0 top
J27  microSD  [MICRO-SD-SOCKET]  48.51,78.61 270 bottom
J28  [JST-2-SMD]  33.78,88.65 90 top
J29  QWIIC_RIGHT_ANGLE  [JST04_1MM_RA]  58.67,79.76 270 top
J30  [USB-C-16P-2LAYER-PADS]  65.02,77.22 0 top
J31  microSD  [MICRO-SD-SOCKET]  71.88,78.61 270 bottom
J32  [JST-2-SMD]  57.15,88.65 90 top
J33  QWIIC_RIGHT_ANGLE  [JST04_1MM_RA]  82.04,79.76 270 top
J34  [USB-C-16P-2LAYER-PADS]  88.39,77.22 0 top
J35  microSD  [MICRO-SD-SOCKET]  95.25,78.61 270 bottom
J36  [JST-2-SMD]  80.52,88.65 90 top
J37  QWIIC_RIGHT_ANGLE  [JST04_1MM_RA]  105.41,79.76 270 top
J38  [USB-C-16P-2LAYER-PADS]  111.76,77.22 0 top
J39  microSD  [MICRO-SD-SOCKET]  118.62,78.61 270 bottom
J40  [JST-2-SMD]  103.89,88.65 90 top
JP1  [SMT-JUMPER_2_NC_TRACE_SILK]  14.48,36.07 0 bottom
JP2  [SMT-JUMPER_2_NC_TRACE_SILK]  37.85,36.07 0 bottom
JP3  [SMT-JUMPER_2_NC_TRACE_SILK]  61.21,36.07 0 bottom
JP4  [SMT-JUMPER_2_NC_TRACE_SILK]  84.58,36.07 0 bottom
JP5  [SMT-JUMPER_2_NC_TRACE_SILK]  107.95,36.07 0 bottom
JP6  [SMT-JUMPER_2_NC_TRACE_SILK]  14.48,97.54 0 bottom
JP7  [SMT-JUMPER_2_NC_TRACE_SILK]  37.85,97.54 0 bottom
JP8  [SMT-JUMPER_2_NC_TRACE_SILK]  61.21,97.54 0 bottom
JP9  [SMT-JUMPER_2_NC_TRACE_SILK]  84.58,97.54 0 bottom
JP10  [SMT-JUMPER_2_NC_TRACE_SILK]  107.95,97.54 0 bottom
LOGO1  OSHW-LOGOMINI  [OSHW-LOGO-MINI]  50.55,17.02 0 bottom
LOGO2  OSHW-LOGOMINI  [OSHW-LOGO-MINI]  27.18,17.02 0 bottom
LOGO3  QWIIC_LOGO_4MM  [QWIIC_4MM]  34.67,14.35 0 top
LOGO4  QWIIC_LOGO_4MM  [QWIIC_4MM]  11.3,14.35 0 top
LOGO5  OSHW-LOGOMINI  [OSHW-LOGO-MINI]  73.91,17.02 0 bottom
LOGO6  QWIIC_LOGO_4MM  [QWIIC_4MM]  58.04,14.35 0 top
LOGO7  OSHW-LOGOMINI  [OSHW-LOGO-MINI]  97.28,17.02 0 bottom
LOGO8  QWIIC_LOGO_4MM  [QWIIC_4MM]  81.41,14.35 0 top
LOGO9  OSHW-LOGOMINI  [OSHW-LOGO-MINI]  120.65,17.02 0 bottom
LOGO10  QWIIC_LOGO_4MM  [QWIIC_4MM]  104.78,14.35 0 top
LOGO11  OSHW-LOGOMINI  [OSHW-LOGO-MINI]  27.18,78.49 0 bottom
LOGO12  QWIIC_LOGO_4MM  [QWIIC_4MM]  11.3,75.82 0 top
LOGO13  OSHW-LOGOMINI  [OSHW-LOGO-MINI]  50.55,78.49 0 bottom
LOGO14  QWIIC_LOGO_4MM  [QWIIC_4MM]  34.67,75.82 0 top
LOGO15  OSHW-LOGOMINI  [OSHW-LOGO-MINI]  73.91,78.49 0 bottom
LOGO16  QWIIC_LOGO_4MM  [QWIIC_4MM]  58.04,75.82 0 top
LOGO17  OSHW-LOGOMINI  [OSHW-LOGO-MINI]  97.28,78.49 0 bottom
LOGO18  QWIIC_LOGO_4MM  [QWIIC_4MM]  81.41,75.82 0 top
LOGO19  OSHW-LOGOMINI  [OSHW-LOGO-MINI]  120.65,78.49 0 bottom
LOGO20  QWIIC_LOGO_4MM  [QWIIC_4MM]  104.78,75.82 0 top
Q1  MBT3904DW1T1  [SC70-6]  49.28,19.56 90 top
Q2  MBT3904DW1T1  [SC70-6]  25.91,19.56 90 top
Q3  20V/4.2A/52mΩ/1.4W  [SOT23-3]  18.29,28.45 90 top
Q4  20V/4.2A/52mΩ/1.4W  [SOT23-3]  41.66,28.45 90 top
Q5  MBT3904DW1T1  [SC70-6]  72.64,19.56 90 top
Q6  20V/4.2A/52mΩ/1.4W  [SOT23-3]  65.02,28.45 90 top
Q7  MBT3904DW1T1  [SC70-6]  96.01,19.56 90 top
Q8  20V/4.2A/52mΩ/1.4W  [SOT23-3]  88.39,28.45 90 top
Q9  MBT3904DW1T1  [SC70-6]  119.38,19.56 90 top
Q10  20V/4.2A/52mΩ/1.4W  [SOT23-3]  111.76,28.45 90 top
Q11  MBT3904DW1T1  [SC70-6]  25.91,81.03 90 top
Q12  20V/4.2A/52mΩ/1.4W  [SOT23-3]  18.29,89.92 90 top
Q13  MBT3904DW1T1  [SC70-6]  49.28,81.03 90 top
Q14  20V/4.2A/52mΩ/1.4W  [SOT23-3]  41.66,89.92 90 top
Q15  MBT3904DW1T1  [SC70-6]  72.64,81.03 90 top
Q16  20V/4.2A/52mΩ/1.4W  [SOT23-3]  65.02,89.92 90 top
Q17  MBT3904DW1T1  [SC70-6]  96.01,81.03 90 top
Q18  20V/4.2A/52mΩ/1.4W  [SOT23-3]  88.39,89.92 90 top
Q19  MBT3904DW1T1  [SC70-6]  119.38,81.03 90 top
Q20  20V/4.2A/52mΩ/1.4W  [SOT23-3]  111.76,89.92 90 top
R1  10k  [0402-TIGHT]  41.66,24.64 180 top
R2  10k  [0402-TIGHT]  24.64,24.64 90 top
R3  1k  [0402-TIGHT]  15.75,38.61 0 top
R4  1k  [0402-TIGHT]  15.75,40.51 0 top
R5  1k  [0402-TIGHT]  39.12,38.61 0 top
R6  2.0k  [0603]  13.21,36.07 180 top
R7  10k  [0402-TIGHT]  18.29,24.64 180 top
R8  10k  [0402-TIGHT]  20.83,32.26 180 top
R9  5.1k  [0402-TIGHT]  23.37,12.57 90 top
R10  5.1k  [0402-TIGHT]  13.21,12.57 90 top
R11  2.0k  [0603]  36.58,36.07 180 top
R12  10k  [0402-TIGHT]  49.28,17.65 180 top
R13  10k  [0402-TIGHT]  49.28,21.46 0 top
R14  10k  [0402-TIGHT]  48.01,24.64 90 top
R15  1k  [0402-TIGHT]  39.12,40.51 0 top
R16  10k  [0402-TIGHT]  44.2,32.26 180 top
R17  10k  [0402-TIGHT]  25.91,17.65 180 top
R18  10k  [0402-TIGHT]  25.91,21.46 0 top
R19  5.1k  [0402-TIGHT]  46.74,12.57 90 top
R20  5.1k  [0402-TIGHT]  36.58,12.57 90 top
R21  1k  [0402-TIGHT]  39.12,36.7 0 top
R22  10k  [0402-TIGHT]  65.02,24.64 180 top
R23  1k  [0402-TIGHT]  62.48,38.61 0 top
R24  2.0k  [0603]  59.94,36.07 180 top
R25  10k  [0402-TIGHT]  72.64,17.65 180 top
R26  10k  [0402-TIGHT]  72.64,21.46 0 top
R27  10k  [0402-TIGHT]  71.37,24.64 90 top
R28  1k  [0402-TIGHT]  62.48,40.51 0 top
R29  10k  [0402-TIGHT]  67.56,32.26 180 top
R30  5.1k  [0402-TIGHT]  70.1,12.57 90 top
R31  5.1k  [0402-TIGHT]  59.94,12.57 90 top
R32  1k  [0402-TIGHT]  62.48,36.7 0 top
R33  10k  [0402-TIGHT]  88.39,24.64 180 top
R34  1k  [0402-TIGHT]  15.75,36.7 0 top
R35  1k  [0402-TIGHT]  85.85,38.61 0 top
R36  2.0k  [0603]  83.31,36.07 180 top
R37  10k  [0402-TIGHT]  96.01,17.65 180 top
R38  10k  [0402-TIGHT]  96.01,21.46 0 top
R39  10k  [0402-TIGHT]  94.74,24.64 90 top
R40  1k  [0402-TIGHT]  85.85,40.51 0 top
R41  10k  [0402-TIGHT]  90.93,32.26 180 top
R42  5.1k  [0402-TIGHT]  93.47,12.57 90 top
R43  5.1k  [0402-TIGHT]  83.31,12.57 90 top
R44  1k  [0402-TIGHT]  85.85,36.7 0 top
R45  10k  [0402-TIGHT]  111.76,24.64 180 top
R46  1k  [0402-TIGHT]  109.22,38.61 0 top
R47  2.0k  [0603]  106.68,36.07 180 top
R48  10k  [0402-TIGHT]  119.38,17.65 180 top
R49  10k  [0402-TIGHT]  119.38,21.46 0 top
R50  10k  [0402-TIGHT]  118.11,24.64 90 top
R51  1k  [0402-TIGHT]  109.22,40.51 0 top
R52  10k  [0402-TIGHT]  114.3,32.26 180 top
R53  5.1k  [0402-TIGHT]  116.84,12.57 90 top
R54  5.1k  [0402-TIGHT]  106.68,12.57 90 top
R55  1k  [0402-TIGHT]  109.22,36.7 0 top
R56  10k  [0402-TIGHT]  18.29,86.11 180 top
R57  1k  [0402-TIGHT]  15.75,100.08 0 top
R58  2.0k  [0603]  13.21,97.54 180 top
R59  10k  [0402-TIGHT]  25.91,79.12 180 top
R60  10k  [0402-TIGHT]  25.91,82.93 0 top
R61  10k  [0402-TIGHT]  24.64,86.11 90 top
R62  1k  [0402-TIGHT]  15.75,101.98 0 top
R63  10k  [0402-TIGHT]  20.83,93.73 180 top
R64  5.1k  [0402-TIGHT]  23.37,74.04 90 top
R65  5.1k  [0402-TIGHT]  13.21,74.04 90 top
R66  1k  [0402-TIGHT]  15.75,98.17 0 top
R67  10k  [0402-TIGHT]  41.66,86.11 180 top
R68  1k  [0402-TIGHT]  39.12,100.08 0 top
R69  2.0k  [0603]  36.58,97.54 180 top
R70  10k  [0402-TIGHT]  49.28,79.12 180 top
R71  10k  [0402-TIGHT]  49.28,82.93 0 top
R72  10k  [0402-TIGHT]  48.01,86.11 90 top
R73  1k  [0402-TIGHT]  39.12,101.98 0 top
R74  10k  [0402-TIGHT]  44.2,93.73 180 top
R75  5.1k  [0402-TIGHT]  46.74,74.04 90 top
R76  5.1k  [0402-TIGHT]  36.58,74.04 90 top
R77  1k  [0402-TIGHT]  39.12,98.17 0 top
R78  10k  [0402-TIGHT]  65.02,86.11 180 top
R79  1k  [0402-TIGHT]  62.48,100.08 0 top
R80  2.0k  [0603]  59.94,97.54 180 top
R81  10k  [0402-TIGHT]  72.64,79.12 180 top
R82  10k  [0402-TIGHT]  72.64,82.93 0 top
R83  10k  [0402-TIGHT]  71.37,86.11 90 top
R84  1k  [0402-TIGHT]  62.48,101.98 0 top
R85  10k  [0402-TIGHT]  67.56,93.73 180 top
R86  5.1k  [0402-TIGHT]  70.1,74.04 90 top
R87  5.1k  [0402-TIGHT]  59.94,74.04 90 top
R88  1k  [0402-TIGHT]  62.48,98.17 0 top
R89  10k  [0402-TIGHT]  88.39,86.11 180 top
R90  1k  [0402-TIGHT]  85.85,100.08 0 top
R91  2.0k  [0603]  83.31,97.54 180 top
R92  10k  [0402-TIGHT]  96.01,79.12 180 top
R93  10k  [0402-TIGHT]  96.01,82.93 0 top
R94  10k  [0402-TIGHT]  94.74,86.11 90 top
R95  1k  [0402-TIGHT]  85.85,101.98 0 top
R96  10k  [0402-TIGHT]  90.93,93.73 180 top
R97  5.1k  [0402-TIGHT]  93.47,74.04 90 top
R98  5.1k  [0402-TIGHT]  83.31,74.04 90 top
R99  1k  [0402-TIGHT]  85.85,98.17 0 top
R100  10k  [0402-TIGHT]  111.76,86.11 180 top
R101  1k  [0402-TIGHT]  109.22,100.08 0 top
R102  2.0k  [0603]  106.68,97.54 180 top
R103  10k  [0402-TIGHT]  119.38,79.12 180 top
R104  10k  [0402-TIGHT]  119.38,82.93 0 top
R105  10k  [0402-TIGHT]  118.11,86.11 90 top
R106  1k  [0402-TIGHT]  109.22,101.98 0 top
R107  10k  [0402-TIGHT]  114.3,93.73 180 top
R108  5.1k  [0402-TIGHT]  116.84,74.04 90 top
R109  5.1k  [0402-TIGHT]  106.68,74.04 90 top
R110  1k  [0402-TIGHT]  109.22,98.17 0 top
S1  Boot  [TACTILE_SWITCH_SMD_4.6X2.8MM]  46.74,30.1 180 top
S2  Reset  [TACTILE_SWITCH_SMD_4.6X2.8MM]  46.74,34.54 180 top
S3  Boot  [TACTILE_SWITCH_SMD_4.6X2.8MM]  23.37,30.1 180 top
S4  Reset  [TACTILE_SWITCH_SMD_4.6X2.8MM]  23.37,34.54 180 top
S5  Boot  [TACTILE_SWITCH_SMD_4.6X2.8MM]  70.1,30.1 180 top
S6  Reset  [TACTILE_SWITCH_SMD_4.6X2.8MM]  70.1,34.54 180 top
S7  Boot  [TACTILE_SWITCH_SMD_4.6X2.8MM]  93.47,30.1 180 top
S8  Reset  [TACTILE_SWITCH_SMD_4.6X2.8MM]  93.47,34.54 180 top
S9  Boot  [TACTILE_SWITCH_SMD_4.6X2.8MM]  116.84,30.1 180 top
S10  Reset  [TACTILE_SWITCH_SMD_4.6X2.8MM]  116.84,34.54 180 top
S11  Boot  [TACTILE_SWITCH_SMD_4.6X2.8MM]  23.37,91.57 180 top
S12  Reset  [TACTILE_SWITCH_SMD_4.6X2.8MM]  23.37,96.01 180 top
S13  Boot  [TACTILE_SWITCH_SMD_4.6X2.8MM]  46.74,91.57 180 top
S14  Reset  [TACTILE_SWITCH_SMD_4.6X2.8MM]  46.74,96.01 180 top
S15  Boot  [TACTILE_SWITCH_SMD_4.6X2.8MM]  70.1,91.57 180 top
S16  Reset  [TACTILE_SWITCH_SMD_4.6X2.8MM]  70.1,96.01 180 top
S17  Boot  [TACTILE_SWITCH_SMD_4.6X2.8MM]  93.47,91.57 180 top
S18  Reset  [TACTILE_SWITCH_SMD_4.6X2.8MM]  93.47,96.01 180 top
S19  Boot  [TACTILE_SWITCH_SMD_4.6X2.8MM]  116.84,91.57 180 top
S20  Reset  [TACTILE_SWITCH_SMD_4.6X2.8MM]  116.84,96.01 180 top
TP1  [PAD.03X.05]  27.18,19.56 0 bottom
TP2  [PAD.03X.05]  28.7,65.66 0 bottom
TP3  [PAD.03X.05]  20.07,61.09 0 bottom
TP4  [PAD.03X.05]  15.88,49.4 0 bottom
TP5  [PAD.03X.05]  50.55,19.56 0 bottom
TP6  [PAD.03X.05]  52.07,65.66 0 bottom
TP7  [PAD.03X.05]  43.43,61.09 0 bottom
TP8  [PAD.03X.05]  39.24,49.4 0 bottom
TP9  [PAD.03X.05]  73.91,19.56 0 bottom
TP10  [PAD.03X.05]  75.44,65.66 0 bottom
TP11  [PAD.03X.05]  66.8,61.09 0 bottom
TP12  [PAD.03X.05]  62.61,49.4 0 bottom
TP13  [PAD.03X.05]  97.28,19.56 0 bottom
TP14  [PAD.03X.05]  98.81,65.66 0 bottom
TP15  [PAD.03X.05]  90.17,61.09 0 bottom
TP16  [PAD.03X.05]  85.98,49.4 0 bottom
TP17  [PAD.03X.05]  120.65,19.56 0 bottom
TP18  [PAD.03X.05]  122.17,65.66 0 bottom
TP19  [PAD.03X.05]  113.54,61.09 0 bottom
TP20  [PAD.03X.05]  109.35,49.4 0 bottom
TP21  [PAD.03X.05]  27.18,81.03 0 bottom
TP22  [PAD.03X.05]  28.7,127.13 0 bottom
TP23  [PAD.03X.05]  20.07,122.55 0 bottom
TP24  [PAD.03X.05]  15.88,110.87 0 bottom
TP25  [PAD.03X.05]  50.55,81.03 0 bottom
TP26  [PAD.03X.05]  52.07,127.13 0 bottom
TP27  [PAD.03X.05]  43.43,122.55 0 bottom
TP28  [PAD.03X.05]  39.24,110.87 0 bottom
TP29  [PAD.03X.05]  73.91,81.03 0 bottom
TP30  [PAD.03X.05]  75.44,127.13 0 bottom
TP31  [PAD.03X.05]  66.8,122.55 0 bottom
TP32  [PAD.03X.05]  62.61,110.87 0 bottom
TP33  [PAD.03X.05]  97.28,81.03 0 bottom
TP34  [PAD.03X.05]  98.81,127.13 0 bottom
TP35  [PAD.03X.05]  90.17,122.55 0 bottom
TP36  [PAD.03X.05]  85.98,110.87 0 bottom
TP37  [PAD.03X.05]  120.65,81.03 0 bottom
TP38  [PAD.03X.05]  122.17,127.13 0 bottom
TP39  [PAD.03X.05]  113.54,122.55 0 bottom
TP40  [PAD.03X.05]  109.35,110.87 0 bottom
U1  MCP73831  [SOT23-5]  13.21,33.53 0 top
U2  ESP-WROOM-32NARROW  [ESP-WROOM-32-NARROW]  18.29,53.85 90 top
U3  AP2112K-3.3  [SOT23-5]  18.29,32.26 0 top
U4  MAX17048  [DFN-8]  13.21,38.61 0 top
U5  AP2112K-3.3  [SOT23-5]  22.1,24.64 270 top
U6  THINGPLUS_LOGICAL  [THINGPLUS_FOOTPRINT]  18.29,44.96 0 top
U7  CH340C  [SO016]  18.29,19.56 0 top
U8  MCP73831  [SOT23-5]  36.58,33.53 0 top
U9  AP2112K-3.3  [SOT23-5]  41.66,32.26 0 top
U10  ESP-WROOM-32NARROW  [ESP-WROOM-32-NARROW]  41.66,53.85 90 top
U11  THINGPLUS_LOGICAL  [THINGPLUS_FOOTPRINT]  41.66,44.96 0 top
U12  CH340C  [SO016]  41.66,19.56 0 top
U13  MAX17048  [DFN-8]  36.58,38.61 0 top
U14  AP2112K-3.3  [SOT23-5]  45.47,24.64 270 top
U15  MCP73831  [SOT23-5]  59.94,33.53 0 top
U16  AP2112K-3.3  [SOT23-5]  65.02,32.26 0 top
U17  ESP-WROOM-32NARROW  [ESP-WROOM-32-NARROW]  65.02,53.85 90 top
U18  THINGPLUS_LOGICAL  [THINGPLUS_FOOTPRINT]  65.02,44.96 0 top
U19  CH340C  [SO016]  65.02,19.56 0 top
U20  MAX17048  [DFN-8]  59.94,38.61 0 top
U21  AP2112K-3.3  [SOT23-5]  68.83,24.64 270 top
U22  MCP73831  [SOT23-5]  83.31,33.53 0 top
U23  AP2112K-3.3  [SOT23-5]  88.39,32.26 0 top
U24  ESP-WROOM-32NARROW  [ESP-WROOM-32-NARROW]  88.39,53.85 90 top
U25  THINGPLUS_LOGICAL  [THINGPLUS_FOOTPRINT]  88.39,44.96 0 top
U26  CH340C  [SO016]  88.39,19.56 0 top
U27  MAX17048  [DFN-8]  83.31,38.61 0 top
U28  AP2112K-3.3  [SOT23-5]  92.2,24.64 270 top
U29  MCP73831  [SOT23-5]  106.68,33.53 0 top
U30  AP2112K-3.3  [SOT23-5]  111.76,32.26 0 top
U31  ESP-WROOM-32NARROW  [ESP-WROOM-32-NARROW]  111.76,53.85 90 top
U32  THINGPLUS_LOGICAL  [THINGPLUS_FOOTPRINT]  111.76,44.96 0 top
U33  CH340C  [SO016]  111.76,19.56 0 top
U34  MAX17048  [DFN-8]  106.68,38.61 0 top
U35  AP2112K-3.3  [SOT23-5]  115.57,24.64 270 top
U36  MCP73831  [SOT23-5]  13.21,95 0 top
U37  AP2112K-3.3  [SOT23-5]  18.29,93.73 0 top
U38  ESP-WROOM-32NARROW  [ESP-WROOM-32-NARROW]  18.29,115.32 90 top
U39  THINGPLUS_LOGICAL  [THINGPLUS_FOOTPRINT]  18.29,106.43 0 top
U40  CH340C  [SO016]  18.29,81.03 0 top
U41  MAX17048  [DFN-8]  13.21,100.08 0 top
U42  AP2112K-3.3  [SOT23-5]  22.1,86.11 270 top
U43  MCP73831  [SOT23-5]  36.58,95 0 top
U44  AP2112K-3.3  [SOT23-5]  41.66,93.73 0 top
U45  ESP-WROOM-32NARROW  [ESP-WROOM-32-NARROW]  41.66,115.32 90 top
U46  THINGPLUS_LOGICAL  [THINGPLUS_FOOTPRINT]  41.66,106.43 0 top
U47  CH340C  [SO016]  41.66,81.03 0 top
U48  MAX17048  [DFN-8]  36.58,100.08 0 top
U49  AP2112K-3.3  [SOT23-5]  45.47,86.11 270 top
U50  MCP73831  [SOT23-5]  59.94,95 0 top
U51  AP2112K-3.3  [SOT23-5]  65.02,93.73 0 top
U52  ESP-WROOM-32NARROW  [ESP-WROOM-32-NARROW]  65.02,115.32 90 top
U53  THINGPLUS_LOGICAL  [THINGPLUS_FOOTPRINT]  65.02,106.43 0 top
U54  CH340C  [SO016]  65.02,81.03 0 top
U55  MAX17048  [DFN-8]  59.94,100.08 0 top
U56  AP2112K-3.3  [SOT23-5]  68.83,86.11 270 top
U57  MCP73831  [SOT23-5]  83.31,95 0 top
U58  AP2112K-3.3  [SOT23-5]  88.39,93.73 0 top
U59  ESP-WROOM-32NARROW  [ESP-WROOM-32-NARROW]  88.39,115.32 90 top
U60  THINGPLUS_LOGICAL  [THINGPLUS_FOOTPRINT]  88.39,106.43 0 top
U61  CH340C  [SO016]  88.39,81.03 0 top
U62  MAX17048  [DFN-8]  83.31,100.08 0 top
U63  AP2112K-3.3  [SOT23-5]  92.2,86.11 270 top
U64  MCP73831  [SOT23-5]  106.68,95 0 top
U65  AP2112K-3.3  [SOT23-5]  111.76,93.73 0 top
U66  ESP-WROOM-32NARROW  [ESP-WROOM-32-NARROW]  111.76,115.32 90 top
U67  THINGPLUS_LOGICAL  [THINGPLUS_FOOTPRINT]  111.76,106.43 0 top
U68  CH340C  [SO016]  111.76,81.03 0 top
U69  MAX17048  [DFN-8]  106.68,100.08 0 top
U70  AP2112K-3.3  [SOT23-5]  115.57,86.11 270 top
U$1  SPARKX-LOGO4  [SPARKX-MEDIUM]  18.29,12.7 0 bottom
U$2  [CHG1]  45.08,38.61 0 top
U$3  [PWR2]  45.21,36.7 0 top
U$4  [STAT0]  45.72,40.51 0 top
U$5  [A03]  50.16,33.53 90 top
U$6  [A12]  50.16,36.07 90 top
U$7  [A21]  50.16,38.61 90 top
U$8  [A30]  50.16,41.15 90 top
U$9  [EN3]  33.66,36.07 0 top
U$10  [130]  33.4,41.15 0 top
U$11  [BOOT0]  46.86,27.94 0 top
U$12  [#RST#0]  50.04,23.24 90 top
U$13  [RST0]  46.86,32.38 0 top
U$14  [VB1]  33.78,33.53 0 top
U$15  [VU0]  33.78,38.61 0 top
U$16  [3V30]  50.16,25.91 90 top
U$17  [#4#0]  51.31,61.47 0 bottom
U$18  [#23#COPI#0]  51.31,51.31 0 bottom
U$19  [#17#TX#0]  51.31,58.93 0 bottom
U$20  [#16#RX#0]  51.31,56.39 0 bottom
U$21  [#19#CIPO#0]  51.31,53.85 0 bottom
U$22  [#18#SCK#0]  51.31,48.77 0 bottom
U$23  [3V30]  26.8,25.91 90 top
U$24  [CHG1]  21.72,38.61 0 top
U$25  [PWR2]  21.84,36.7 0 top
U$26  [STAT0]  22.35,40.51 0 top
U$27  [#35#A5#0]  51.31,46.23 0 bottom
U$28  [#36#A4#0]  51.31,43.69 0 bottom
U$29  [#25#A1#2]  51.31,36.07 0 bottom
U$30  [#26#A0#3]  51.31,33.53 0 bottom
U$31  [#34#A2#1]  51.31,38.61 0 bottom
U$32  [#39#A3#0]  51.31,41.15 0 bottom
U$33  [#12#4]  31.88,43.69 0 bottom
U$34  [#14#9]  31.88,56.39 0 bottom
U$35  [#15#7]  31.88,51.31 0 bottom
U$36  [#27#5]  31.88,46.23 0 bottom
U$37  [#32#8]  31.88,53.85 0 bottom
U$38  [#33#6]  31.88,48.77 0 bottom
U$39  [#EN#1]  31.88,36.07 0 bottom
U$40  [#VBAT#0]  31.88,33.53 0 bottom
U$41  [#VUSB#2]  31.88,38.61 0 bottom
U$42  [#13#LED#0]  31.88,41.15 0 bottom
U$43  [#21#SDA#1]  31.75,61.47 0 bottom
U$44  [#22#SCL#0]  31.75,58.93 0 bottom
U$45  [#PWR#0]  38.73,36.07 0 bottom
U$46  [ESP320]  41.66,66.55 0 bottom
U$47  [THING1]  44.2,64.01 0 bottom
U$48  [PLUS2]  37.85,64.01 0 bottom
U$49  [3V30]  50.16,25.78 270 bottom
U$50  [#RST#0]  50.04,23.24 270 bottom
U$51  [GND1]  50.16,30.99 270 bottom
U$52  [GND1]  50.16,31.11 90 top
U$53  [NC0]  50.16,28.32 270 bottom
U$54  [NC0]  50.16,28.45 90 top
U$55  SPARKX-LOGO4  [SPARKX-MEDIUM]  41.66,12.7 0 bottom
U$56  [GND1]  26.8,30.99 270 bottom
U$57  [#4#0]  27.94,61.47 0 bottom
U$58  [CHG1]  68.45,38.61 0 top
U$59  [PWR2]  68.58,36.7 0 top
U$60  [STAT0]  69.09,40.51 0 top
U$61  [A03]  73.53,33.53 90 top
U$62  [#23#COPI#0]  27.94,51.31 0 bottom
U$63  [A12]  73.53,36.07 90 top
U$64  [A21]  73.53,38.61 90 top
U$65  [A30]  73.53,41.15 90 top
U$66  [EN3]  57.02,36.07 0 top
U$67  [130]  56.77,41.15 0 top
U$68  [A03]  26.8,33.53 90 top
U$69  [A12]  26.8,36.07 90 top
U$70  [A21]  26.8,38.61 90 top
U$71  [A30]  26.8,41.15 90 top
U$72  [#17#TX#0]  27.94,58.93 0 bottom
U$73  [VB1]  10.41,33.53 0 top
U$74  [EN3]  10.29,36.07 0 top
U$75  [GND1]  26.8,31.11 90 top
U$76  [VU0]  10.41,38.61 0 top
U$77  [130]  10.03,41.15 0 top
U$78  [BOOT0]  23.5,27.94 0 top
U$79  [#RST#0]  26.67,23.24 90 top
U$80  [RST0]  23.5,32.38 0 top
U$81  [#16#RX#0]  27.94,56.39 0 bottom
U$82  [#19#CIPO#0]  27.94,53.85 0 bottom
U$83  [#18#SCK#0]  27.94,48.77 0 bottom
U$84  [#35#A5#0]  27.94,46.23 0 bottom
U$85  [#36#A4#0]  27.94,43.69 0 bottom
U$86  [#25#A1#2]  27.94,36.07 0 bottom
U$87  [#26#A0#3]  27.94,33.53 0 bottom
U$88  [#34#A2#1]  27.94,38.61 0 bottom
U$89  [#39#A3#0]  27.94,41.15 0 bottom
U$90  [#12#4]  8.51,43.69 0 bottom
U$91  [#14#9]  8.51,56.39 0 bottom
U$92  [#15#7]  8.51,51.31 0 bottom
U$93  [#27#5]  8.51,46.23 0 bottom
U$94  [#32#8]  8.51,53.85 0 bottom
U$95  [#33#6]  8.51,48.77 0 bottom
U$96  [#EN#1]  8.51,36.07 0 bottom
U$97  [#VBAT#0]  8.51,33.53 0 bottom
U$98  [#VUSB#2]  8.51,38.61 0 bottom
U$99  [#13#LED#0]  8.51,41.15 0 bottom
U$100  [#21#SDA#1]  8.38,61.47 0 bottom
U$101  [#22#SCL#0]  8.38,58.93 0 bottom
U$102  [#PWR#0]  15.37,36.07 0 bottom
U$103  [ESP320]  18.29,66.55 0 bottom
U$104  [THING1]  20.83,64.01 0 bottom
U$105  [PLUS2]  14.48,64.01 0 bottom
U$106  [NC0]  26.8,28.32 270 bottom
U$107  [NC0]  26.8,28.45 90 top
U$108  [3V30]  26.8,25.78 270 bottom
U$109  [#RST#0]  26.67,23.24 270 bottom
U$110  [BOOT0]  70.23,27.94 0 top
U$111  [#RST#0]  73.41,23.24 90 top
U$112  [RST0]  70.23,32.38 0 top
U$113  [VB1]  57.15,33.53 0 top
U$114  [VU0]  57.15,38.61 0 top
U$115  [3V30]  73.53,25.91 90 top
U$116  [#4#0]  74.68,61.47 0 bottom
U$117  [#23#COPI#0]  74.68,51.31 0 bottom
U$118  [#17#TX#0]  74.68,58.93 0 bottom
U$119  [#16#RX#0]  74.68,56.39 0 bottom
U$120  [#19#CIPO#0]  74.68,53.85 0 bottom
U$121  [#18#SCK#0]  74.68,48.77 0 bottom
U$122  [#35#A5#0]  74.68,46.23 0 bottom
U$123  [#36#A4#0]  74.68,43.69 0 bottom
U$124  [#25#A1#2]  74.68,36.07 0 bottom
U$125  [#26#A0#3]  74.68,33.53 0 bottom
U$126  [#34#A2#1]  74.68,38.61 0 bottom
U$127  [#39#A3#0]  74.68,41.15 0 bottom
U$128  [#12#4]  55.24,43.69 0 bottom
U$129  [#14#9]  55.24,56.39 0 bottom
U$130  [#15#7]  55.24,51.31 0 bottom
U$131  [#27#5]  55.24,46.23 0 bottom
U$132  [#32#8]  55.24,53.85 0 bottom
U$133  [#33#6]  55.24,48.77 0 bottom
U$134  [#EN#1]  55.24,36.07 0 bottom
U$135  [#VBAT#0]  55.24,33.53 0 bottom
U$136  [#VUSB#2]  55.24,38.61 0 bottom
U$137  [#13#LED#0]  55.24,41.15 0 bottom
U$138  [#21#SDA#1]  55.12,61.47 0 bottom
U$139  [#22#SCL#0]  55.12,58.93 0 bottom
U$140  [#PWR#0]  62.1,36.07 0 bottom
U$141  [ESP320]  65.02,66.55 0 bottom
U$142  [THING1]  67.56,64.01 0 bottom
U$143  [PLUS2]  61.21,64.01 0 bottom
U$144  [3V30]  73.53,25.78 270 bottom
U$145  [#RST#0]  73.41,23.24 270 bottom
U$146  [GND1]  73.53,30.99 270 bottom
U$147  [GND1]  73.53,31.11 90 top
U$148  [NC0]  73.53,28.32 270 bottom
U$149  [NC0]  73.53,28.45 90 top
U$150  SPARKX-LOGO4  [SPARKX-MEDIUM]  65.02,12.7 0 bottom
U$151  [CHG1]  91.82,38.61 0 top
U$152  [PWR2]  91.95,36.7 0 top
U$153  [STAT0]  92.46,40.51 0 top
U$154  [A03]  96.9,33.53 90 top
U$155  [A12]  96.9,36.07 90 top
U$156  [A21]  96.9,38.61 90 top
U$157  [A30]  96.9,41.15 90 top
U$158  [EN3]  80.39,36.07 0 top
U$159  [130]  80.14,41.15 0 top
U$160  [BOOT0]  93.6,27.94 0 top
U$161  [#RST#0]  96.77,23.24 90 top
U$162  [RST0]  93.6,32.38 0 top
U$163  [VB1]  80.52,33.53 0 top
U$164  [VU0]  80.52,38.61 0 top
U$165  [3V30]  96.9,25.91 90 top
U$166  [#4#0]  98.04,61.47 0 bottom
U$167  [#23#COPI#0]  98.04,51.31 0 bottom
U$168  [#17#TX#0]  98.04,58.93 0 bottom
U$169  [#16#RX#0]  98.04,56.39 0 bottom
U$170  [#19#CIPO#0]  98.04,53.85 0 bottom
U$171  [#18#SCK#0]  98.04,48.77 0 bottom
U$172  [#35#A5#0]  98.04,46.23 0 bottom
U$173  [#36#A4#0]  98.04,43.69 0 bottom
U$174  [#25#A1#2]  98.04,36.07 0 bottom
U$175  [#26#A0#3]  98.04,33.53 0 bottom
U$176  [#34#A2#1]  98.04,38.61 0 bottom
U$177  [#39#A3#0]  98.04,41.15 0 bottom
U$178  [#12#4]  78.61,43.69 0 bottom
U$179  [#14#9]  78.61,56.39 0 bottom
U$180  [#15#7]  78.61,51.31 0 bottom
U$181  [#27#5]  78.61,46.23 0 bottom
U$182  [#32#8]  78.61,53.85 0 bottom
U$183  [#33#6]  78.61,48.77 0 bottom
U$184  [#EN#1]  78.61,36.07 0 bottom
U$185  [#VBAT#0]  78.61,33.53 0 bottom
U$186  [#VUSB#2]  78.61,38.61 0 bottom
U$187  [#13#LED#0]  78.61,41.15 0 bottom
U$188  [#21#SDA#1]  78.49,61.47 0 bottom
U$189  [#22#SCL#0]  78.49,58.93 0 bottom
U$190  [#PWR#0]  85.47,36.07 0 bottom
U$191  [ESP320]  88.39,66.55 0 bottom
U$192  [THING1]  90.93,64.01 0 bottom
U$193  [PLUS2]  84.58,64.01 0 bottom
U$194  [3V30]  96.9,25.78 270 bottom
U$195  [#RST#0]  96.77,23.24 270 bottom
U$196  [GND1]  96.9,30.99 270 bottom
U$197  [GND1]  96.9,31.11 90 top
U$198  [NC0]  96.9,28.32 270 bottom
U$199  [NC0]  96.9,28.45 90 top
U$200  SPARKX-LOGO4  [SPARKX-MEDIUM]  88.39,12.7 0 bottom
U$201  [CHG1]  115.19,38.61 0 top
U$202  [PWR2]  115.32,36.7 0 top
U$203  [STAT0]  115.82,40.51 0 top
U$204  [A03]  120.27,33.53 90 top
U$205  [A12]  120.27,36.07 90 top
U$206  [A21]  120.27,38.61 90 top
U$207  [A30]  120.27,41.15 90 top
U$208  [EN3]  103.76,36.07 0 top
U$209  [130]  103.51,41.15 0 top
U$210  [BOOT0]  116.97,27.94 0 top
U$211  [#RST#0]  120.14,23.24 90 top
U$212  [RST0]  116.97,32.38 0 top
U$213  [VB1]  103.89,33.53 0 top
U$214  [VU0]  103.89,38.61 0 top
U$215  [3V30]  120.27,25.91 90 top
U$216  [#4#0]  121.41,61.47 0 bottom
U$217  [#23#COPI#0]  121.41,51.31 0 bottom
U$218  [#17#TX#0]  121.41,58.93 0 bottom
U$219  [#16#RX#0]  121.41,56.39 0 bottom
U$220  [#19#CIPO#0]  121.41,53.85 0 bottom
U$221  [#18#SCK#0]  121.41,48.77 0 bottom
U$222  [#35#A5#0]  121.41,46.23 0 bottom
U$223  [#36#A4#0]  121.41,43.69 0 bottom
U$224  [#25#A1#2]  121.41,36.07 0 bottom
U$225  [#26#A0#3]  121.41,33.53 0 bottom
U$226  [#34#A2#1]  121.41,38.61 0 bottom
U$227  [#39#A3#0]  121.41,41.15 0 bottom
U$228  [#12#4]  101.98,43.69 0 bottom
U$229  [#14#9]  101.98,56.39 0 bottom
U$230  [#15#7]  101.98,51.31 0 bottom
U$231  [#27#5]  101.98,46.23 0 bottom
U$232  [#32#8]  101.98,53.85 0 bottom
U$233  [#33#6]  101.98,48.77 0 bottom
U$234  [#EN#1]  101.98,36.07 0 bottom
U$235  [#VBAT#0]  101.98,33.53 0 bottom
U$236  [#VUSB#2]  101.98,38.61 0 bottom
U$237  [#13#LED#0]  101.98,41.15 0 bottom
U$238  [#21#SDA#1]  101.85,61.47 0 bottom
U$239  [#22#SCL#0]  101.85,58.93 0 bottom
U$240  [#PWR#0]  108.84,36.07 0 bottom
U$241  [ESP320]  111.76,66.55 0 bottom
U$242  [THING1]  114.3,64.01 0 bottom
U$243  [PLUS2]  107.95,64.01 0 bottom
U$244  [3V30]  120.27,25.78 270 bottom
U$245  [#RST#0]  120.14,23.24 270 bottom
U$246  [GND1]  120.27,30.99 270 bottom
U$247  [GND1]  120.27,31.11 90 top
U$248  [NC0]  120.27,28.32 270 bottom
U$249  [NC0]  120.27,28.45 90 top
U$250  SPARKX-LOGO4  [SPARKX-MEDIUM]  111.76,12.7 0 bottom
U$251  [CHG1]  21.72,100.08 0 top
U$252  [PWR2]  21.84,98.17 0 top
U$253  [STAT0]  22.35,101.98 0 top
U$254  [A03]  26.8,95 90 top
U$255  [A12]  26.8,97.54 90 top
U$256  [A21]  26.8,100.08 90 top
U$257  [A30]  26.8,102.62 90 top
U$258  [EN3]  10.29,97.54 0 top
U$259  [130]  10.03,102.62 0 top
U$260  [BOOT0]  23.5,89.41 0 top
U$261  [#RST#0]  26.67,84.71 90 top
U$262  [RST0]  23.5,93.85 0 top
U$263  [VB1]  10.41,95 0 top
U$264  [VU0]  10.41,100.08 0 top
U$265  [3V30]  26.8,87.38 90 top
U$266  [#4#0]  27.94,122.94 0 bottom
U$267  [#23#COPI#0]  27.94,112.78 0 bottom
U$268  [#17#TX#0]  27.94,120.4 0 bottom
U$269  [#16#RX#0]  27.94,117.86 0 bottom
U$270  [#19#CIPO#0]  27.94,115.32 0 bottom
U$271  [#18#SCK#0]  27.94,110.24 0 bottom
U$272  [#35#A5#0]  27.94,107.7 0 bottom
U$273  [#36#A4#0]  27.94,105.16 0 bottom
U$274  [#25#A1#2]  27.94,97.54 0 bottom
U$275  [#26#A0#3]  27.94,95 0 bottom
U$276  [#34#A2#1]  27.94,100.08 0 bottom
U$277  [#39#A3#0]  27.94,102.62 0 bottom
U$278  [#12#4]  8.51,105.16 0 bottom
U$279  [#14#9]  8.51,117.86 0 bottom
U$280  [#15#7]  8.51,112.78 0 bottom
U$281  [#27#5]  8.51,107.7 0 bottom
U$282  [#32#8]  8.51,115.32 0 bottom
U$283  [#33#6]  8.51,110.24 0 bottom
U$284  [#EN#1]  8.51,97.54 0 bottom
U$285  [#VBAT#0]  8.51,95 0 bottom
U$286  [#VUSB#2]  8.51,100.08 0 bottom
U$287  [#13#LED#0]  8.51,102.62 0 bottom
U$288  [#21#SDA#1]  8.38,122.94 0 bottom
U$289  [#22#SCL#0]  8.38,120.4 0 bottom
U$290  [#PWR#0]  15.37,97.54 0 bottom
U$291  [ESP320]  18.29,128.02 0 bottom
U$292  [THING1]  20.83,125.48 0 bottom
U$293  [PLUS2]  14.48,125.48 0 bottom
U$294  [3V30]  26.8,87.25 270 bottom
U$295  [#RST#0]  26.67,84.71 270 bottom
U$296  [GND1]  26.8,92.46 270 bottom
U$297  [GND1]  26.8,92.58 90 top
U$298  [NC0]  26.8,89.79 270 bottom
U$299  [NC0]  26.8,89.92 90 top
U$300  SPARKX-LOGO4  [SPARKX-MEDIUM]  18.29,74.17 0 bottom
U$301  [CHG1]  45.08,100.08 0 top
U$302  [PWR2]  45.21,98.17 0 top
U$303  [STAT0]  45.72,101.98 0 top
U$304  [A03]  50.16,95 90 top
U$305  [A12]  50.16,97.54 90 top
U$306  [A21]  50.16,100.08 90 top
U$307  [A30]  50.16,102.62 90 top
U$308  [EN3]  33.66,97.54 0 top
U$309  [130]  33.4,102.62 0 top
U$310  [BOOT0]  46.86,89.41 0 top
U$311  [#RST#0]  50.04,84.71 90 top
U$312  [RST0]  46.86,93.85 0 top
U$313  [VB1]  33.78,95 0 top
U$314  [VU0]  33.78,100.08 0 top
U$315  [3V30]  50.16,87.38 90 top
U$316  [#4#0]  51.31,122.94 0 bottom
U$317  [#23#COPI#0]  51.31,112.78 0 bottom
U$318  [#17#TX#0]  51.31,120.4 0 bottom
U$319  [#16#RX#0]  51.31,117.86 0 bottom
U$320  [#19#CIPO#0]  51.31,115.32 0 bottom
U$321  [#18#SCK#0]  51.31,110.24 0 bottom
U$322  [#35#A5#0]  51.31,107.7 0 bottom
U$323  [#36#A4#0]  51.31,105.16 0 bottom
U$324  [#25#A1#2]  51.31,97.54 0 bottom
U$325  [#26#A0#3]  51.31,95 0 bottom
U$326  [#34#A2#1]  51.31,100.08 0 bottom
U$327  [#39#A3#0]  51.31,102.62 0 bottom
U$328  [#12#4]  31.88,105.16 0 bottom
U$329  [#14#9]  31.88,117.86 0 bottom
U$330  [#15#7]  31.88,112.78 0 bottom
U$331  [#27#5]  31.88,107.7 0 bottom
U$332  [#32#8]  31.88,115.32 0 bottom
U$333  [#33#6]  31.88,110.24 0 bottom
U$334  [#EN#1]  31.88,97.54 0 bottom
U$335  [#VBAT#0]  31.88,95 0 bottom
U$336  [#VUSB#2]  31.88,100.08 0 bottom
U$337  [#13#LED#0]  31.88,102.62 0 bottom
U$338  [#21#SDA#1]  31.75,122.94 0 bottom
U$339  [#22#SCL#0]  31.75,120.4 0 bottom
U$340  [#PWR#0]  38.73,97.54 0 bottom
U$341  [ESP320]  41.66,128.02 0 bottom
U$342  [THING1]  44.2,125.48 0 bottom
U$343  [PLUS2]  37.85,125.48 0 bottom
U$344  [3V30]  50.16,87.25 270 bottom
U$345  [#RST#0]  50.04,84.71 270 bottom
U$346  [GND1]  50.16,92.46 270 bottom
U$347  [GND1]  50.16,92.58 90 top
U$348  [NC0]  50.16,89.79 270 bottom
U$349  [NC0]  50.16,89.92 90 top
U$350  SPARKX-LOGO4  [SPARKX-MEDIUM]  41.66,74.17 0 bottom
U$351  [CHG1]  68.45,100.08 0 top
U$352  [PWR2]  68.58,98.17 0 top
U$353  [STAT0]  69.09,101.98 0 top
U$354  [A03]  73.53,95 90 top
U$355  [A12]  73.53,97.54 90 top
U$356  [A21]  73.53,100.08 90 top
U$357  [A30]  73.53,102.62 90 top
U$358  [EN3]  57.02,97.54 0 top
U$359  [130]  56.77,102.62 0 top
U$360  [BOOT0]  70.23,89.41 0 top
U$361  [#RST#0]  73.41,84.71 90 top
U$362  [RST0]  70.23,93.85 0 top
U$363  [VB1]  57.15,95 0 top
U$364  [VU0]  57.15,100.08 0 top
U$365  [3V30]  73.53,87.38 90 top
U$366  [#4#0]  74.68,122.94 0 bottom
U$367  [#23#COPI#0]  74.68,112.78 0 bottom
U$368  [#17#TX#0]  74.68,120.4 0 bottom
U$369  [#16#RX#0]  74.68,117.86 0 bottom
U$370  [#19#CIPO#0]  74.68,115.32 0 bottom
U$371  [#18#SCK#0]  74.68,110.24 0 bottom
U$372  [#35#A5#0]  74.68,107.7 0 bottom
U$373  [#36#A4#0]  74.68,105.16 0 bottom
U$374  [#25#A1#2]  74.68,97.54 0 bottom
U$375  [#26#A0#3]  74.68,95 0 bottom
U$376  [#34#A2#1]  74.68,100.08 0 bottom
U$377  [#39#A3#0]  74.68,102.62 0 bottom
U$378  [#12#4]  55.24,105.16 0 bottom
U$379  [#14#9]  55.24,117.86 0 bottom
U$380  [#15#7]  55.24,112.78 0 bottom
U$381  [#27#5]  55.24,107.7 0 bottom
U$382  [#32#8]  55.24,115.32 0 bottom
U$383  [#33#6]  55.24,110.24 0 bottom
U$384  [#EN#1]  55.24,97.54 0 bottom
U$385  [#VBAT#0]  55.24,95 0 bottom
U$386  [#VUSB#2]  55.24,100.08 0 bottom
U$387  [#13#LED#0]  55.24,102.62 0 bottom
U$388  [#21#SDA#1]  55.12,122.94 0 bottom
U$389  [#22#SCL#0]  55.12,120.4 0 bottom
U$390  [#PWR#0]  62.1,97.54 0 bottom
U$391  [ESP320]  65.02,128.02 0 bottom
U$392  [THING1]  67.56,125.48 0 bottom
U$393  [PLUS2]  61.21,125.48 0 bottom
U$394  [3V30]  73.53,87.25 270 bottom
U$395  [#RST#0]  73.41,84.71 270 bottom
U$396  [GND1]  73.53,92.46 270 bottom
U$397  [GND1]  73.53,92.58 90 top
U$398  [NC0]  73.53,89.79 270 bottom
U$399  [NC0]  73.53,89.92 90 top
U$400  SPARKX-LOGO4  [SPARKX-MEDIUM]  65.02,74.17 0 bottom
U$401  [CHG1]  91.82,100.08 0 top
U$402  [PWR2]  91.95,98.17 0 top
U$403  [STAT0]  92.46,101.98 0 top
U$404  [A03]  96.9,95 90 top
U$405  [A12]  96.9,97.54 90 top
U$406  [A21]  96.9,100.08 90 top
U$407  [A30]  96.9,102.62 90 top
U$408  [EN3]  80.39,97.54 0 top
U$409  [130]  80.14,102.62 0 top
U$410  [BOOT0]  93.6,89.41 0 top
U$411  [#RST#0]  96.77,84.71 90 top
U$412  [RST0]  93.6,93.85 0 top
U$413  [VB1]  80.52,95 0 top
U$414  [VU0]  80.52,100.08 0 top
U$415  [3V30]  96.9,87.38 90 top
U$416  [#4#0]  98.04,122.94 0 bottom
U$417  [#23#COPI#0]  98.04,112.78 0 bottom
U$418  [#17#TX#0]  98.04,120.4 0 bottom
U$419  [#16#RX#0]  98.04,117.86 0 bottom
U$420  [#19#CIPO#0]  98.04,115.32 0 bottom
U$421  [#18#SCK#0]  98.04,110.24 0 bottom
U$422  [#35#A5#0]  98.04,107.7 0 bottom
U$423  [#36#A4#0]  98.04,105.16 0 bottom
U$424  [#25#A1#2]  98.04,97.54 0 bottom
U$425  [#26#A0#3]  98.04,95 0 bottom
U$426  [#34#A2#1]  98.04,100.08 0 bottom
U$427  [#39#A3#0]  98.04,102.62 0 bottom
U$428  [#12#4]  78.61,105.16 0 bottom
U$429  [#14#9]  78.61,117.86 0 bottom
U$430  [#15#7]  78.61,112.78 0 bottom
U$431  [#27#5]  78.61,107.7 0 bottom
U$432  [#32#8]  78.61,115.32 0 bottom
U$433  [#33#6]  78.61,110.24 0 bottom
U$434  [#EN#1]  78.61,97.54 0 bottom
U$435  [#VBAT#0]  78.61,95 0 bottom
U$436  [#VUSB#2]  78.61,100.08 0 bottom
U$437  [#13#LED#0]  78.61,102.62 0 bottom
U$438  [#21#SDA#1]  78.49,122.94 0 bottom
U$439  [#22#SCL#0]  78.49,120.4 0 bottom
U$440  [#PWR#0]  85.47,97.54 0 bottom
U$441  [ESP320]  88.39,128.02 0 bottom
U$442  [THING1]  90.93,125.48 0 bottom
U$443  [PLUS2]  84.58,125.48 0 bottom
U$444  [3V30]  96.9,87.25 270 bottom
U$445  [#RST#0]  96.77,84.71 270 bottom
U$446  [GND1]  96.9,92.46 270 bottom
U$447  [GND1]  96.9,92.58 90 top
U$448  [NC0]  96.9,89.79 270 bottom
U$449  [NC0]  96.9,89.92 90 top
U$450  SPARKX-LOGO4  [SPARKX-MEDIUM]  88.39,74.17 0 bottom
U$451  [CHG1]  115.19,100.08 0 top
U$452  [PWR2]  115.32,98.17 0 top
U$453  [STAT0]  115.82,101.98 0 top
U$454  [A03]  120.27,95 90 top
U$455  [A12]  120.27,97.54 90 top
U$456  [A21]  120.27,100.08 90 top
U$457  [A30]  120.27,102.62 90 top
U$458  [EN3]  103.76,97.54 0 top
U$459  [130]  103.51,102.62 0 top
U$460  [BOOT0]  116.97,89.41 0 top
U$461  [#RST#0]  120.14,84.71 90 top
U$462  [RST0]  116.97,93.85 0 top
U$463  [VB1]  103.89,95 0 top
U$464  [VU0]  103.89,100.08 0 top
U$465  [3V30]  120.27,87.38 90 top
U$466  [#4#0]  121.41,122.94 0 bottom
U$467  [#23#COPI#0]  121.41,112.78 0 bottom
U$468  [#17#TX#0]  121.41,120.4 0 bottom
U$469  [#16#RX#0]  121.41,117.86 0 bottom
U$470  [#19#CIPO#0]  121.41,115.32 0 bottom
U$471  [#18#SCK#0]  121.41,110.24 0 bottom
U$472  [#35#A5#0]  121.41,107.7 0 bottom
U$473  [#36#A4#0]  121.41,105.16 0 bottom
U$474  [#25#A1#2]  121.41,97.54 0 bottom
U$475  [#26#A0#3]  121.41,95 0 bottom
U$476  [#34#A2#1]  121.41,100.08 0 bottom
U$477  [#39#A3#0]  121.41,102.62 0 bottom
U$478  [#12#4]  101.98,105.16 0 bottom
U$479  [#14#9]  101.98,117.86 0 bottom
U$480  [#15#7]  101.98,112.78 0 bottom
U$481  [#27#5]  101.98,107.7 0 bottom
U$482  [#32#8]  101.98,115.32 0 bottom
U$483  [#33#6]  101.98,110.24 0 bottom
U$484  [#EN#1]  101.98,97.54 0 bottom
U$485  [#VBAT#0]  101.98,95 0 bottom
U$486  [#VUSB#2]  101.98,100.08 0 bottom
U$487  [#13#LED#0]  101.98,102.62 0 bottom
U$488  [#21#SDA#1]  101.85,122.94 0 bottom
U$489  [#22#SCL#0]  101.85,120.4 0 bottom
U$490  [#PWR#0]  108.84,97.54 0 bottom
U$491  [ESP320]  111.76,128.02 0 bottom
U$492  [THING1]  114.3,125.48 0 bottom
U$493  [PLUS2]  107.95,125.48 0 bottom
U$494  [3V30]  120.27,87.25 270 bottom
U$495  [#RST#0]  120.14,84.71 270 bottom
U$496  [GND1]  120.27,92.46 270 bottom
U$497  [GND1]  120.27,92.58 90 top
U$498  [NC0]  120.27,89.79 270 bottom
U$499  [NC0]  120.27,89.92 90 top
U$500  SPARKX-LOGO4  [SPARKX-MEDIUM]  111.76,74.17 0 bottom